# Altium PCB MB1075.PcbDoc (part 1 of 4)
Units mm, origin at the board's own origin, x right, y up, seen from the top; angles counter-clockwise.
Board outline 66 x 119.3 mm, 4 copper layers (TOP, L2, L3, Bottom), stack 1.548 mm thick; 196 components, 219 nets, 897 pads, 500 vias.
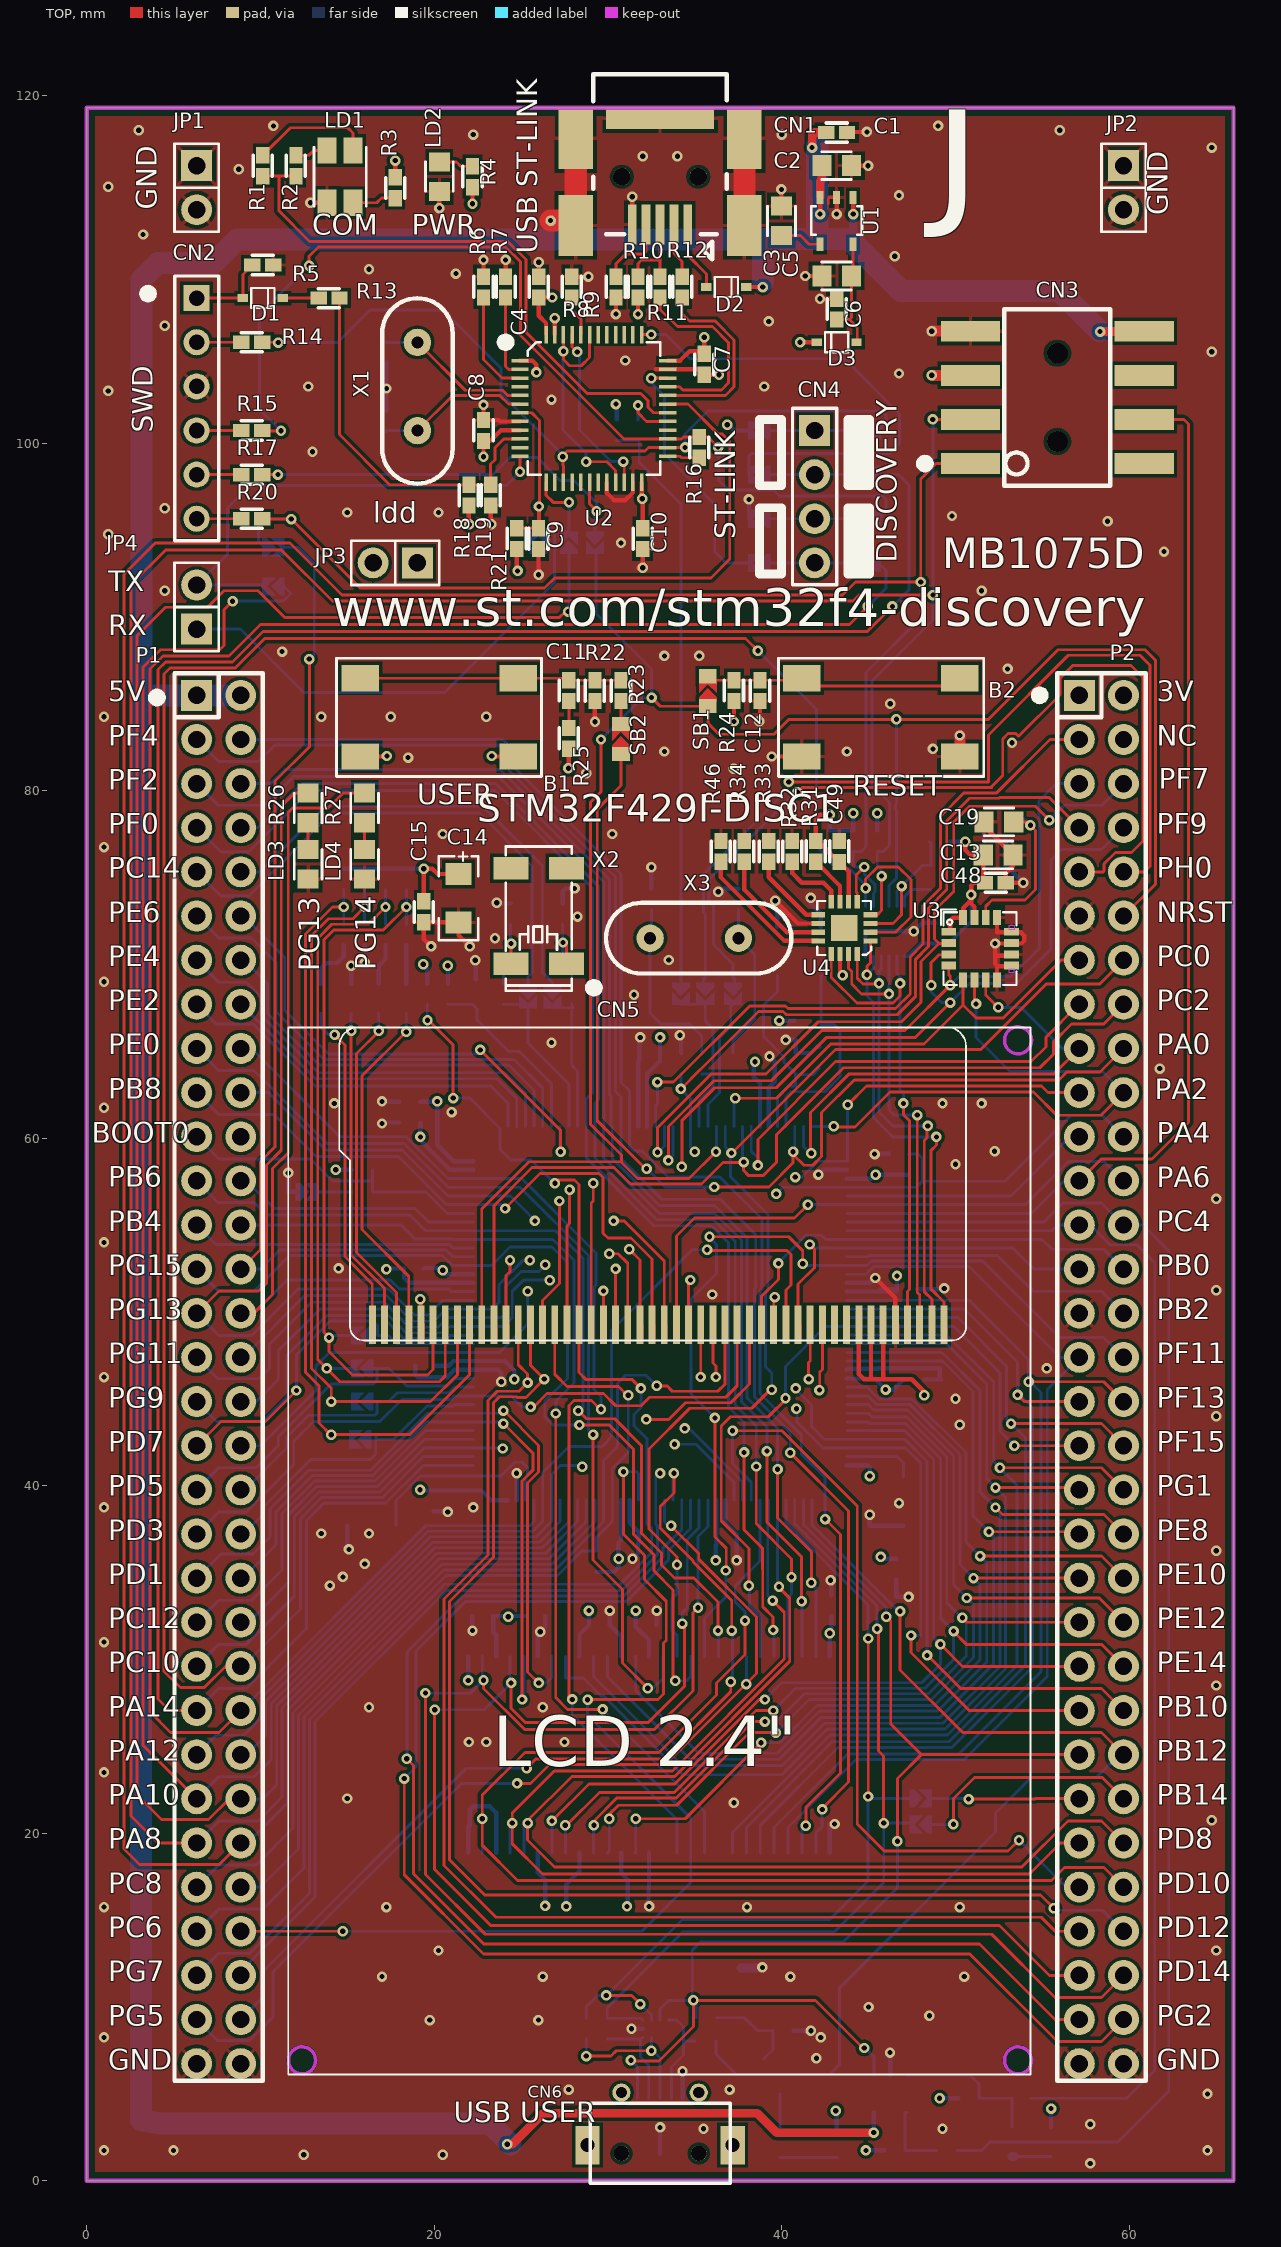
[diagram p0: TOP view]
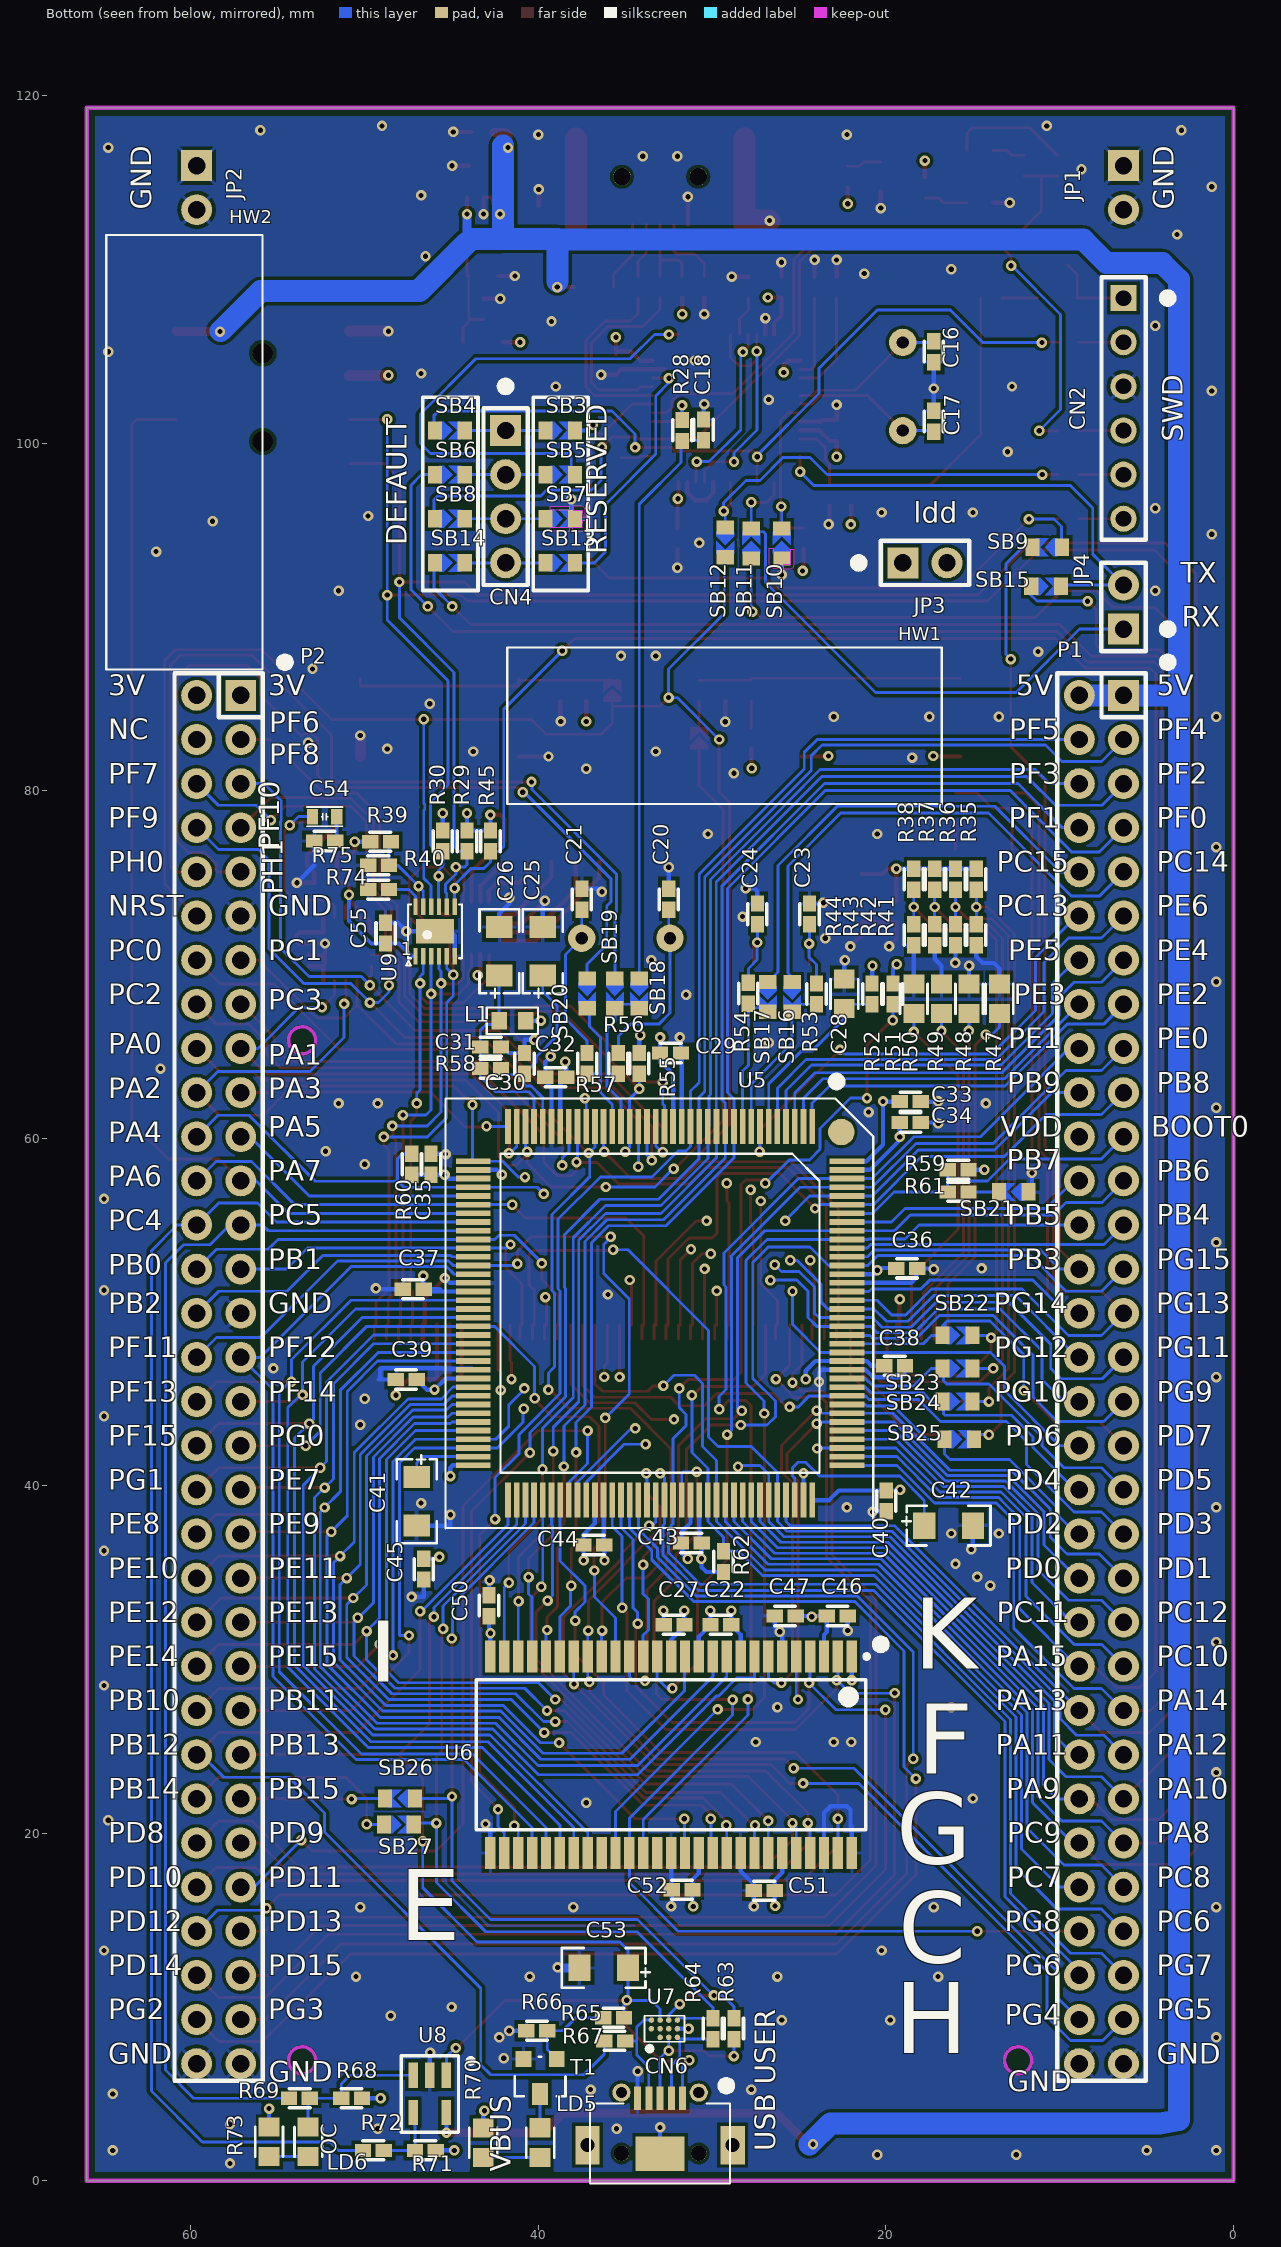
[diagram p1: Bottom view, seen from below]
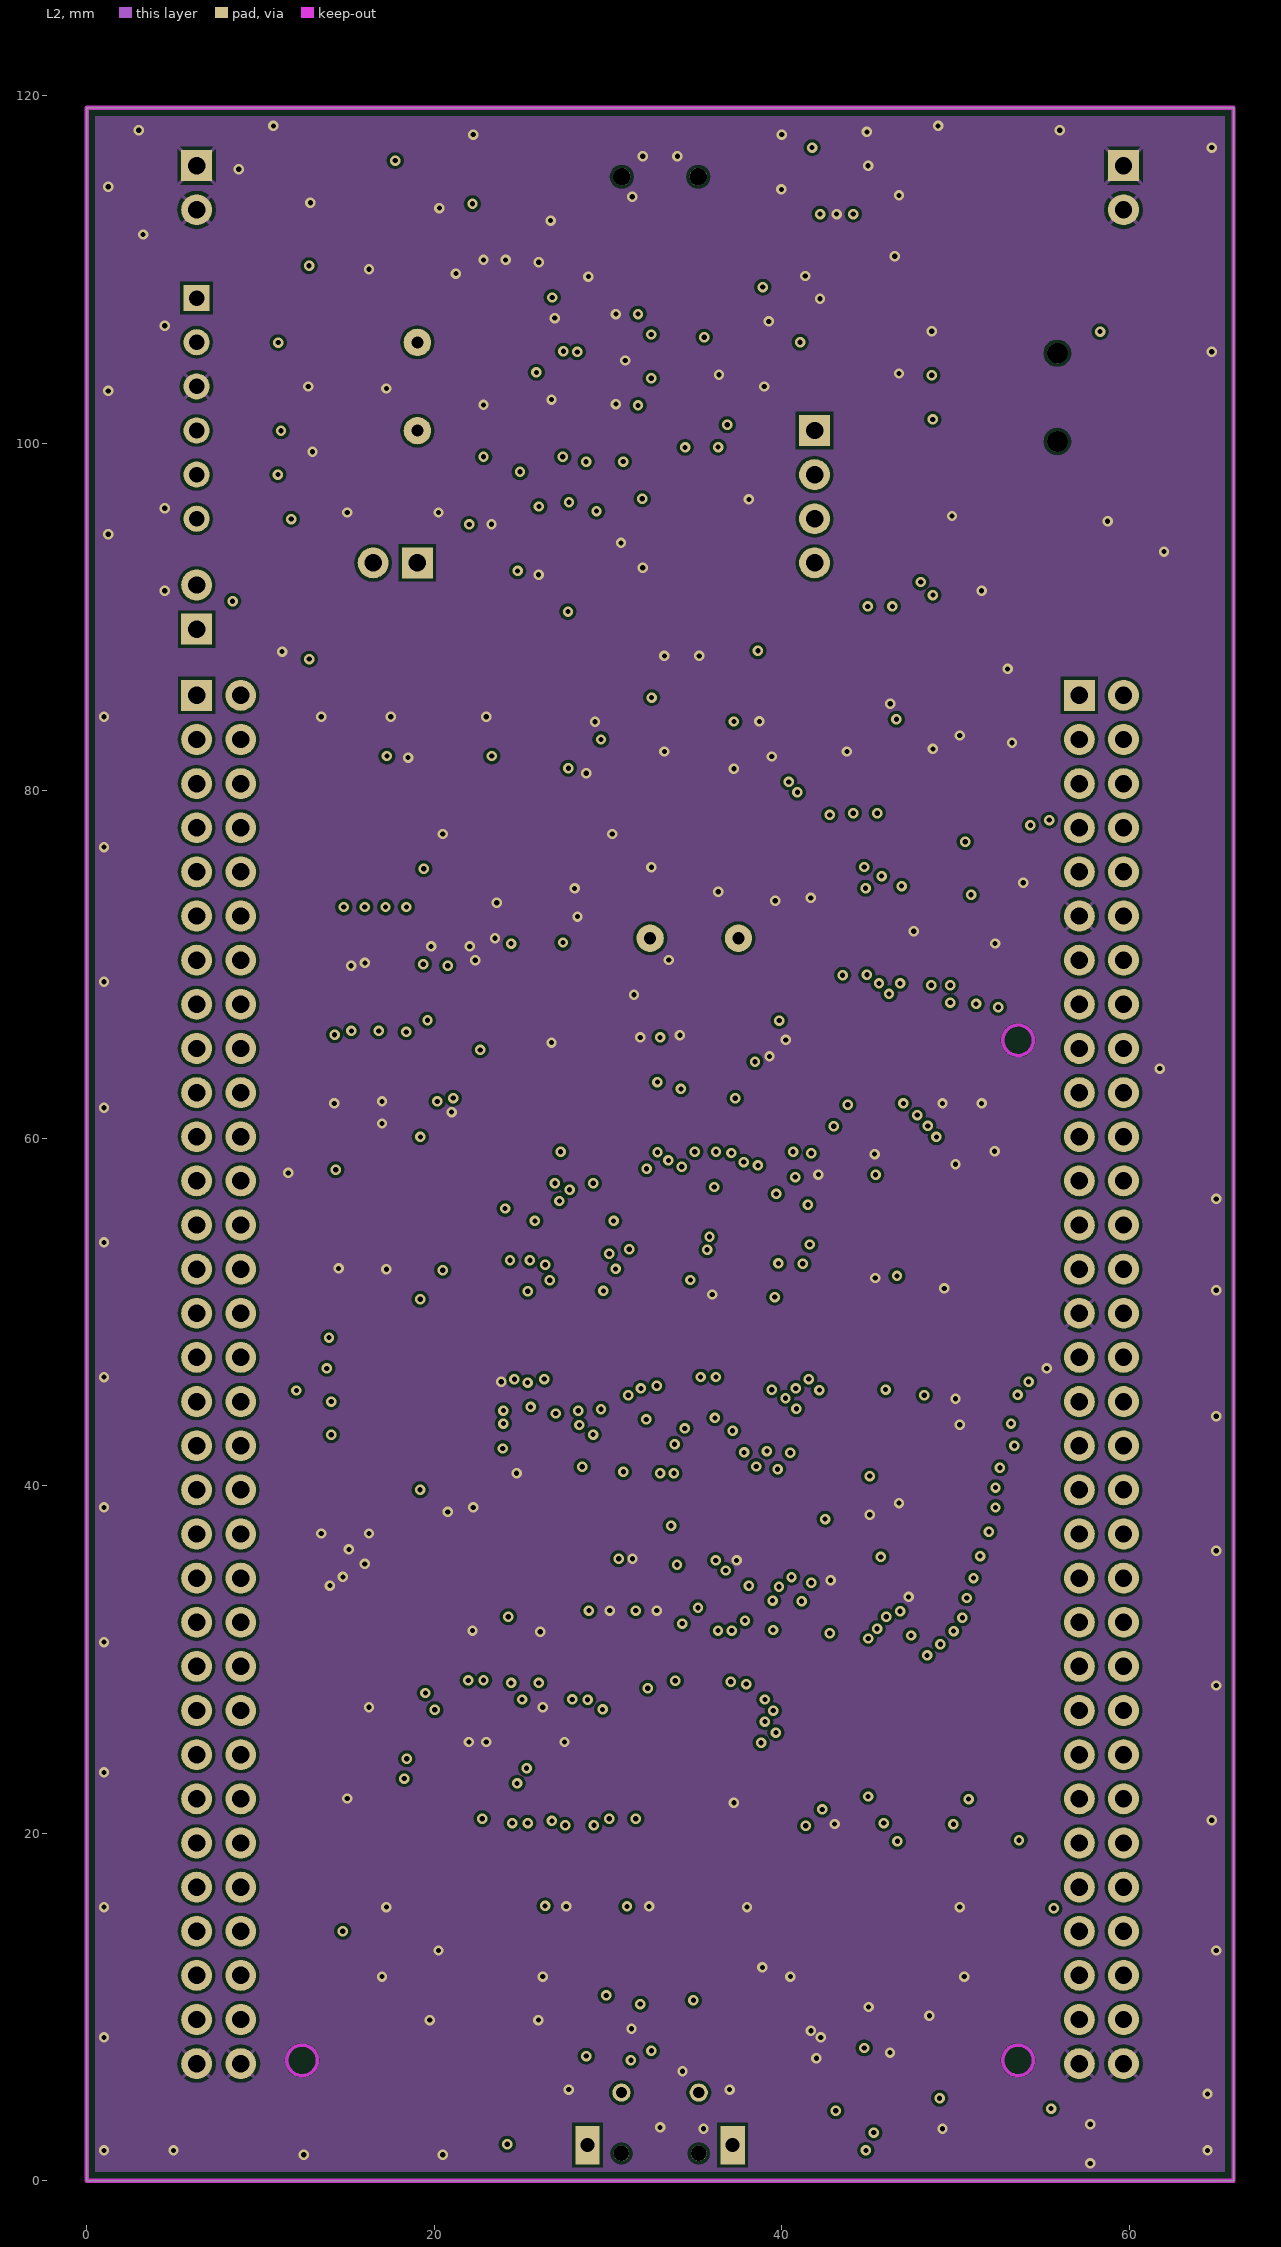
[diagram p2: L2]
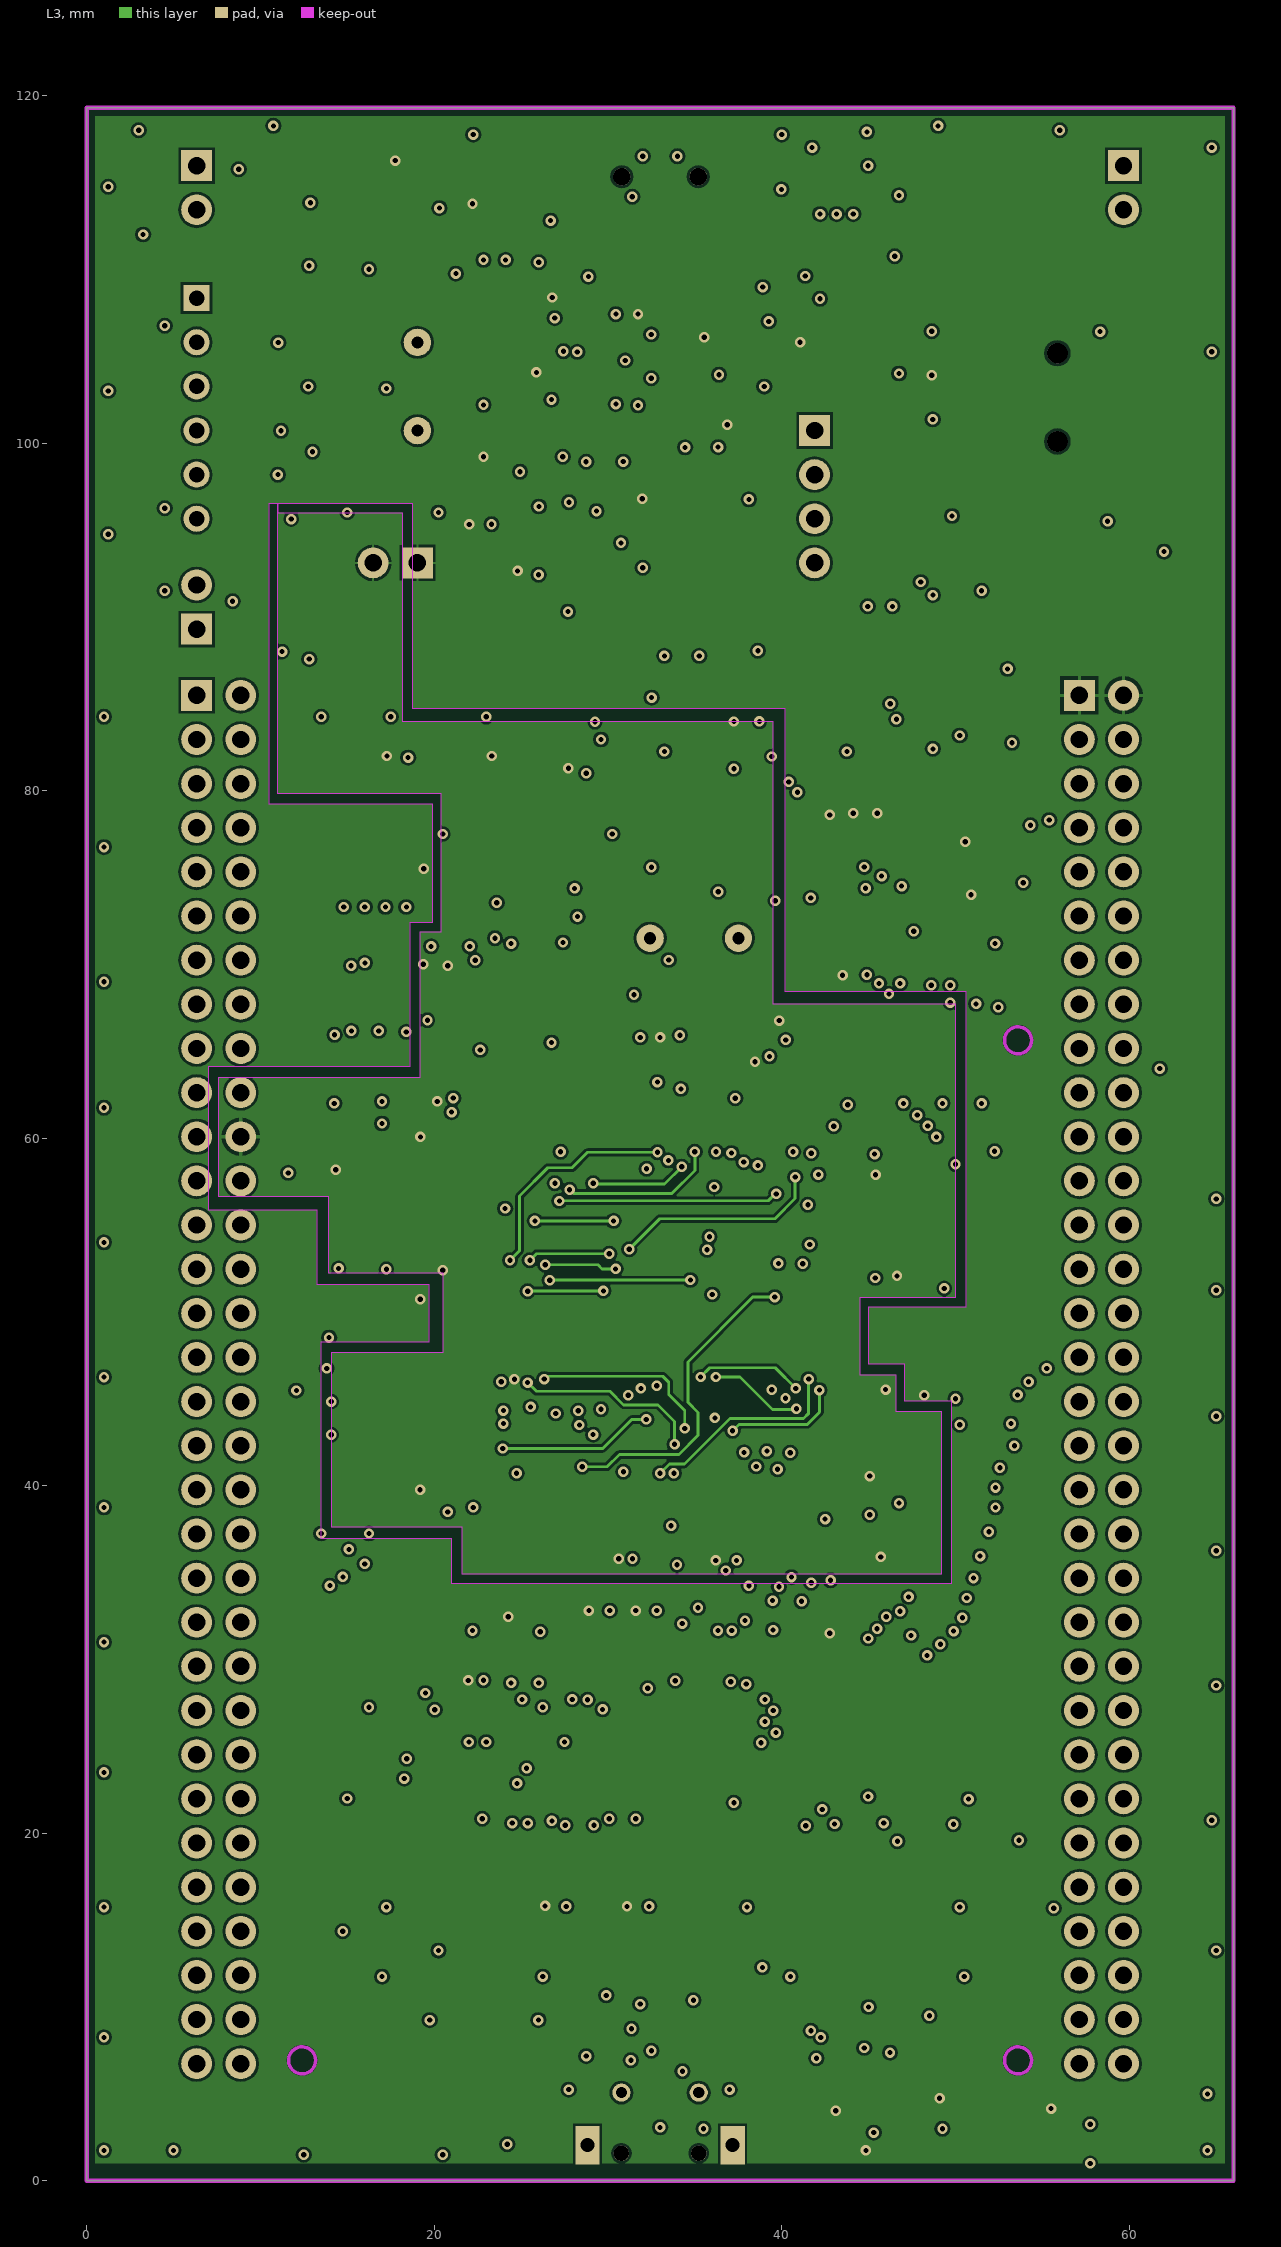
[diagram p3: L3]

## Layer stack, top to bottom
Top Solder: solder mask 0.01, Solder Resist, Dk 3.5
TOP: signal copper 0.012
Dielectric 1: dielectric 0.127, FR-4, Dk 4.8
L2: signal copper 0.035
Dielectric2: dielectric 1.2, FR-4, Dk 4.8
L3: signal copper 0.035
Dielectric3: dielectric 0.127, FR-4, Dk 4.8
Bottom: signal copper 0.012
Bottom Solder: solder mask 0.01, Solder Resist, Dk 3.5

## Board outline
0,0 66,0 66,119.3 0,119.3

## Design rules (kind name [scope] priority, off if disabled: settings)
BoardOutlineClearance [All and not (IsPad and ((Name = 'CN1-6') or (Name = 'CN1-7'))) and not OnSilkscreen and not TouchesRoom('RoomDefinition_C1')] p1: gap=0.5 ignorepadtopadclearanceinfootprint=FALSE
Clearance Clearance_C1 [TouchesRoom('RoomDefinition_C1') vs IsBoardOutline] p1: gap=0.3 ignorepadtopadclearanceinfootprint=FALSE
Clearance Clearance_Keepout [IsKeepout] p2: gap=0 ignorepadtopadclearanceinfootprint=FALSE
Clearance "Clearance_Poly-Poly L3" [InPolygon and OnLayer('L3') vs InPolygon and OnLayer('L3')] p3: gap=0.5 ignorepadtopadclearanceinfootprint=FALSE
Clearance "Clearance_Poly-Hole L3" [InPolygon and OnLayer('L3')] p4: gap=0.15 ignorepadtopadclearanceinfootprint=FALSE
Clearance Clearance_CN1 [IsPad and (Name = 'CN1-6') vs IsKeepout] p5: gap=0 ignorepadtopadclearanceinfootprint=FALSE
Clearance CopperToBoard [InPolygon vs IsBoardOutline] p6: gap=0.5 ignorepadtopadclearanceinfootprint=FALSE
Clearance "Clearance_Pont citroen" [HasFootprint('JP2_SMD') and IsComponentPrimitive and IsRegion vs HasFootprint('JP2_SMD') and IsComponentPrimitive and IsRegion or IsTrack or InPolygon or IsVia] p7: gap=0.1 ignorepadtopadclearanceinfootprint=FALSE except(0.15: Via-Region Poly-Region)
Clearance [All] p8: gap=0.15 ignorepadtopadclearanceinfootprint=FALSE except(0.18: Arc-Fill Arc-Poly Arc-Region Track-Fill Track-Poly Track-Region SMDPad-Fill SMDPad-Poly SMDPad-Region THPad-Fill THPad-Poly THPad-Region Via-Fill Via-Poly Via-Region Fill-Fill Fill-Poly Fill-Region Poly-Poly Poly-Region Region-Region)
ComponentClearance [All and not HasFootprint('VIA')] p1: gap=0.1 collisioncheckmode=3 verticalgap=0.254 showdistances=FALSE
MinimumSolderMaskSliver [All] p1: minsoldermaskwidth=0.1
PolygonConnect "PolygonConnect_P1 P2" [IsPad and ((Name = 'P2-1') or (Name =  'P2-2') or (Name = 'P1-22'))] p1: connectstyle=Relief reliefconductorwidth=0.21 reliefentries=4 polygonreliefangle="90 Angle" airgapwidth=0.21
PolygonConnect PolygonConnect_T1 [IsPad and (Name = 'T1-2')] p2: thpad.connectstyle=Relief thpad.reliefconductorwidth=0.254 thpad.reliefentries=4 thpad.polygonreliefangle="90 Angle" thpad.airgapwidth=0.254 smdpad.connectstyle=Relief smdpad.reliefconductorwidth=0.203 smdpad.reliefentries=4 smdpad.polygonreliefangle="90 Angle" smdpad.airgapwidth=0.21 via.connectstyle=Relief via.reliefconductorwidth=0.254 via.reliefentries=4 via.polygonreliefangle="90 Angle" via.airgapwidth=0.254
PolygonConnect PolygonConnect_JP3 [IsPad and ((Name = 'JP3-1') or (Name = 'JP3-2'))] p3: connectstyle=Relief reliefconductorwidth=0.15 reliefentries=4 polygonreliefangle="90 Angle" airgapwidth=0.15
PolygonConnect "PolygonConnect_Via comp" [HasFootprint('VIA')] p4: connectstyle=Direct reliefconductorwidth=0.254 reliefentries=4 polygonreliefangle="90 Angle" airgapwidth=0.254
PolygonConnect [All] p5: thpad.connectstyle=Relief thpad.reliefconductorwidth=0.21 thpad.reliefentries=4 thpad.polygonreliefangle="45 Angle" thpad.airgapwidth=0.21 smdpad.connectstyle=Relief smdpad.reliefconductorwidth=0.21 smdpad.reliefentries=4 smdpad.polygonreliefangle="90 Angle" smdpad.airgapwidth=0.21 via.connectstyle=Direct via.reliefconductorwidth=0.254 via.reliefentries=4 via.polygonreliefangle="90 Angle" via.airgapwidth=0.254
RoutingVias [All] p1: holewidth=0.3 width=0.6 viastyle="Through Hole" minholewidth=0.3 minwidth=0.6 maxholewidth=0.3 maxwidth=0.6
SolderMaskExpansion SolderMaskExpansion_via [HasFootprint('via') or IsVia] p1: expansion=-1
SolderMaskExpansion [All] p2: expansion=0.05
Width [All] p1: maxlimit=2 minlimit=0.15 preferedwidth=0.165
28 further rules are at their usual default settings.

## Classes and differential pairs
net class PH[0..2]: PH0 PH1 PH2
net class PG[0..15]: PG2 PG3 PG4 PG5 PG6 PG7 PG8 PG9 PG13 PG14 PG15
net class PF[0..15]: PF6 PF7 PF8 PF9 PF10 PF11
net class PE[0..15]: PE0 PE1 PE2 PE3 PE4 PE5 PE6
net class PD[0..15]: PD2 PD4 PD5 PD7 PD11 PD12 PD13
net class PC[0..15]: PC0 PC1 PC2 PC3 PC4 PC5 PC6 PC8 PC9 PC10 PC11 PC12 PC13 PC14 PC15
net class PB[0..15]: PB0 PB1 PB2 PB3 PB4 PB5 PB6 PB7 PB12 PB13 PB14 PB15
net class PA[0..15]: PA0 PA1 PA2 PA4 PA5 PA7 PA8 PA9 PA10 PA11 PA12 PA13 PA14 PA15
net class IM[0..3]: IM0 IM1 IM2 IM3
net class G[0..7]: G0 G1 G2 G3 G4 G5 G6 G7
net class D[0..15]: D0 D1 D2 D3 D4 D5 D6 D7 D8 D9 D10 D11 D12 D13 D14 D15
net class B[0..7]: B0 B1 B2 B3 B4 B5 B6 B7
net class A[0..11]: A0 A1 A2 A3 A4 A5 A6 A7 A8 A9 A10 A11
component class U_USB_OTG_FS: C53 CN6 LD5 LD6 R63 R64 R65 R66 R67 R68 R69 R70 R71 R72 R73 T1 U7 U8
component class U_STM32Fx: C20 C21 C23 C24 C25 C26 C28 C29 C30 C31 C32 C33 C34 C35 C36 C37 C38 C39 C40 C41 C42 C43 C44 C45 L1 R52 R53 R54 R56 R57 R58 R59 R61 SB16 SB17 SB18 SB19 SB20 SB21 SB22 SB23 SB24 SB25 U5 X2 X3
component class U_ST_LINK: C1 C2 C3 C4 C5 C6 C9 C16 C17 C18 C27 C46 C47 CN1 CN2 CN4 D1 D2 D3 JP1 JP2 JP3 JP4 LD1 LD2 R1 R2 R3 R4 R5 R6 R7 R8 R9 R10 R11 R12 R13 R14 R15 R16 R17 R18 R19 R20 R21 R28 SB3 SB4 SB5 SB6 SB7 SB8 SB9 SB10 SB11 SB12 SB13 SB14 SB15 U1 U2 X1
component class U_SDRAM: C7 C8 C10 C15 C22 C50 C51 U6
component class U_LCD-24: C14 C49 C52 C55 CN5 R29 R30 R31 R32 R33 R34 R35 R36 R37 R38 R39 R40 R41 R42 R43 R44 R45 R46 R47 R48 R49 R50 R51 R55 R60 R62 R74 U4 U9
component class "U_IO Peripherals": B1 B2 C11 C12 C13 C19 C48 C54 CN3 LD3 LD4 R22 R23 R24 R25 R26 R27 R75 SB1 SB2 U3
component class MB1075: P1 P2 SB26 SB27

## Components (designator, comment, footprint, x,y, rotation, side; value= is the part's Value field where it differs from the comment)
B1 "SW-PUSH-CMS_BLUE" BP1CMS 20.3,84.21 r90 top
B2 "SW-PUSH-CMS_BLACK" BP1CMS 45.7,84.21 r270 top
C1 "100nF" 0402C 43.16,117.865 r270 top
C2 "1µF_X5R_0603" 0603C 43.16,115.96 r180 top value=1µF
C3 "10nF_X7R_0603" 0603C 39.985,112.785 r270 top value=10NF
C4 "100nF" 0402C 26.015,108.975 r0 top
C5 "1µF_X5R_0603" 0603C 43.16,109.61 r180 top value=1µF
C6 "100nF" 0402C 43.16,107.705 r0 top
C7 "100nF" 0402C 35.54,104.53 r180 top
C8 "100nF" 0402C 22.84,100.72 r0 top
C9 "100nF" 0402C 26,94.5 r180 top
C10 "100nF" 0402C 32,94.5 r180 top
C11 "100nF" 0402C 27.75,85.75 r0 top
C12 "100nF" 0402C 38.75,85.75 r180 top
C13 "10uF" 0603C 52.45,76.3 r180 top value=100nF
C14 "4.7uF" TAN-A 21.4,73.8 r90 top value=100pF
C15 "100nF" 0402C 19.406,73.025 r180 top
C16 "20pF" 0402C 17.25,105.25 r180 bottom value=100nF
C17 "20pF" 0402C 17.25,101.25 r0 bottom value=100nF
C18 "20pF" 0402C 30.5,100.75 r180 bottom value=100nF
C19 "10nF/25V" 0603C 52.5,78.2 r0 top value=100nF
C20 "20pF" 0402C 32.5,73.75 r0 bottom value=100nF
C21 "20pF" 0402C 37.5,73.75 r0 bottom value=100nF
C22 "100nF" 0402C 29.5,32 r90 bottom
C23 "6.8pF" 0402C 24.4,72.9 r0 bottom value=100nF
C24 "6.8pF" 0402C 27.4,72.9 r0 bottom value=100nF
C25 "1uF" TAN-A 39.75,70.75 r270 bottom value=10uF
C26 "1uF" TAN-A 42.25,70.75 r270 bottom value=10uF
C27 "100nF" 0402C 32.197,32 r90 bottom
C28 "1uF" 0603C 22.4,68.3 r270 bottom value=100nF
C29 "100nF" 0402C 32.4,64.9 r270 bottom
C30 "100nF" 0402C 40.8,64.3 r0 bottom
C31 "100nF" 0402C 42.75,65.25 r270 bottom
C32 "100nF" 0402C 39,63.5 r90 bottom
C33 "100nF" 0402C 18.6,62.1 r270 bottom
C34 "100nF" 0402C 18.6,60.9 r270 bottom
C35 "100nF" 0402C 46.176,58.492 r180 bottom
C36 "100nF" 0402C 18.8,52.5 r270 bottom
C37 "100nF" 0402C 47.2,51.3 r90 bottom
C38 "100nF" 0402C 19.506,46.904 r270 bottom
C39 "100nF" 0402C 47.605,46.11 r90 bottom
C40 "100nF" 0402C 19.983,39.125 r0 bottom
C41 "2.2uF" TAN-A 47,39.1 r90 bottom
C42 "2.2uF" TAN-A 16.4,37.7 r0 bottom
C43 "100nF" 0402C 31.2,36.7 r90 bottom
C44 "100nF" 0402C 36.81,36.585 r90 bottom
C45 "100nF" 0402C 46.6,35.2 r0 bottom
C46 "100nF" 0402C 22.8,32.5 r270 bottom
C47 "100nF" 0402C 25.8,32.5 r90 bottom
C48 "100nF" 0402C 52.3,74.7 r270 top
C49 "100nF" 0402C 43.31,76.493 r0 top
C50 "100nF" 0402C 42.843,33.092 r180 bottom
C51 "100nF" 0402C 27,16.7 r90 bottom
C52 "100nF" 0402C 31.73,16.741 r90 bottom
C53 "4.7uF" TAN-A 36.25,12.25 r180 bottom value=47uF
C54 "Capacitor" C0603 52.304,78.5 r0 bottom value=470nF
C55 "100nF" 0402C 48.797,71.8 r0 bottom
CN1 "USB-MINI-typeB" USB-MINI-B-SMD 33,115.325 r0 top
CN2 "Header 6" HDR1X6 6.33,108.34 r270 top
CN3 "SSM-104-L-DH" SSM-104-L-DH 55.86,102.625 r270 top
CN4 "Header 4" "Header 4" 41.89,100.72 r270 top
CN5 "FRD240C48003-B" LCD_FRIDA_FRD240C48003-B 32.959,36.246 r180 top
CN6 "USB-MICRO-AB" USB-MICRO-AB 33,4.75 r90 bottom
D1 "BAT60JFILM" SOD323/A 10.14,108.34 r180 top
D2 "BAT60JFILM" SOD323/A 36.81,108.975 r180 top
D3 "BAT60JFILM" SOD323/A 43.16,105.8 r0 top
HW1 "STICKER_BOARD_REF" STICKER_25X9 29.293,83.73 r0 bottom
HW2 "STICKER_BOARD_REF" STICKER_25X9 60.37,99.478 r90 bottom
JP1 "" SIP2/2.54 6.33,115.96 r270 top
JP2 "" SIP2/2.54 59.67,115.96 r270 top
JP3 "" SIP2/2.54 19.03,93.1 r180 top
JP4 "JP2" SIP2/2.54 6.33,89.29 r90 top
L1 "BEAD" 0603L 41.5,66.75 r0 bottom value=100uH
LD1 "LD_BICOLOR_CMS" HSMF-A201 14.585,115.325 r90 top
LD2 "LED, red" 0603D 20.3,115.325 r270 top
LD3 "Green" 0603D 12.75,75.75 r270 top
LD4 "Red" 0603D 16,75.75 r270 top
LD5 "Green" 0603D 39.9,2.2 r90 bottom
LD6 "Red" 0603D 53.25,2.25 r90 bottom
P1 "Header 32X2" HDR2X32 7.6,46.11 r270 top
P2 "Header 32X2" HDR2X32 58.4,46.11 r270 top
R1 "100" 0402R 10.14,115.96 r180 top value=10K
R2 "100" 0402R 12.045,115.96 r180 top value=10K
R3 "0" 0402R 17.76,114.69 r180 top value=10K
R4 "1K" 0402R 22.205,115.325 r0 top value=10K
R5 "10K" 0402R 10.14,110.245 r90 top
R6 "10K" 0402R 22.84,108.975 r0 top
R7 "10K" 0402R 24.11,108.975 r0 top
R8 "100K" 0402R 27.92,108.975 r0 top value=10K
R9 "100K" 0402R 30.46,108.975 r0 top value=10K
R10 "1K5" 0402R 31.73,108.975 r0 top value=10K
R11 "0" 0402R 33,108.975 r0 top value=10K
R12 "0" 0402R 34.27,108.975 r0 top value=10K
R13 "[NA]" 0402R 13.95,108.34 r90 top value=10K
R14 "22" 0402R 9.505,105.8 r90 top value=10K
R15 "22" 0402R 9.505,100.72 r90 top value=10K
R16 "100" 0402R 35.25,99.75 r180 top value=10K
R17 "22" 0402R 9.505,98.18 r90 top value=10K
R18 "4K7" 0402R 22,97 r180 top value=10K
R19 "4K7" 0402R 23.25,97 r180 top value=10K
R20 "22" 0402R 9.505,95.64 r90 top value=10K
R21 "100K" 0402R 24.75,94.5 r0 top value=10K
R22 "220K" 0402R 29.25,85.75 r180 top value=10K
R23 "330" 0402R 30.75,85.75 r180 top value=10K
R24 "100K" 0402R 37.25,85.75 r0 top value=10K
R25 "100" 0402R 27.75,83 r0 top value=10K
R26 "510" 0603R 12.75,79 r270 top value=10K
R27 "680" 0603R 16,79 r270 top value=10K
R28 "100" 0402R 31.73,100.72 r180 bottom value=10K
R29 "4K7" 0402R 44.11,77.1 r0 bottom value=10K
R30 "4K7" 0402R 45.5,77.1 r0 bottom value=10K
R31 "4K7" 0402R 41.965,76.5 r0 top value=10K
R32 "100K" 0402R 40.6,76.5 r180 top value=10K
R33 "100K" 0402R 39.25,76.5 r180 top value=10K
R34 "100K" 0402R 37.847,76.5 r180 top value=10K
R35 "[N/A]" 0402R 14.8,74.9 r0 bottom value=10K
R36 "4K7" 0402R 16,74.9 r0 bottom value=10K
R37 "4K7" 0402R 17.2,74.9 r0 bottom value=10K
R38 "[N/A]" 0402R 18.4,74.9 r0 bottom value=10K
R39 "[N/A]" 0402R 49.085,77.06 r90 bottom value=10K
R40 "0" 0402R 49.2,75.7 r90 bottom value=10K
R41 "4K7" 0402R 14.8,71.7 r0 bottom value=10K
R42 "[N/A]" 0402R 16,71.7 r0 bottom value=10K
R43 "[N/A]" 0402R 17.2,71.7 r0 bottom value=10K
R44 "4K7" 0402R 18.4,71.7 r0 bottom value=10K
R45 "4K7" 0402R 42.76,77.1 r0 bottom value=10K
R46 "100K" 0402R 36.5,76.5 r180 top value=10K
R47 "0" 0603R 13.474,68.017 r270 bottom value=10K
R48 "0" 0603R 15.22,68.017 r270 bottom value=10K
R49 "0" 0603R 16.808,68.017 r270 bottom value=10K
R50 "0" 0603R 18.395,68.017 r270 bottom value=10K
R51 "4K7" 0402R 19.6,68.3 r0 bottom value=10K
R52 "0" 0402R 20.8,68.3 r0 bottom value=10K
R53 "0" 0402R 24,68.3 r0 bottom value=10K
R54 "0" 0402R 27.92,68.335 r0 bottom value=10K
R55 "4K7" 0402R 34.2,64.3 r0 bottom value=10K
R56 "0" 0402R 35.4,64.3 r0 bottom value=10K
R57 "220" 0402R 37.2,64.3 r0 bottom value=10K
R58 "0" 0402R 42.75,64 r90 bottom value=10K
R59 "[N/A]" 0402R 15.855,58.175 r270 bottom value=10K
R60 "4K7" 0402R 47.288,58.492 r180 bottom value=10K
R61 "510" 0402R 15.855,56.905 r270 bottom value=10K
R62 "4K7" 0402R 29.349,35.632 r180 bottom value=10K
R63 "22" 0402R 28.75,8.75 r180 bottom value=10K
R64 "22" 0402R 29.96,8.75 r180 bottom value=10K
R65 "47K" 0402R 35.675,9.385 r90 bottom value=10K
R66 "[N/A]" 0402R 40.093,8.633 r270 bottom value=10K
R67 "0" 0402R 35.609,8.05 r90 bottom value=10K
R68 "47K" 0402R 50.75,4.75 r90 bottom value=10K
R69 "0" 0402R 53.75,4.75 r270 bottom value=10K
R70 "330" 0603R 43.175,2.19 r90 bottom value=10K
R71 "10K" 0402R 46.5,1.75 r90 bottom
R72 "0" 0402R 49.5,1.75 r90 bottom value=10K
R73 "620" 0603R 55.5,2.25 r90 bottom value=10K
R74 "0" 0402R 49.2,74.3 r90 bottom value=10K
R75 "10K" 0402R 52.3,77.1 r90 bottom
SB1 "Circuit Breaker" JP2_SMD 35.75,85.75 r90 top
SB2 "Circuit Breaker" JP2_SMD 30.75,83 r90 top
SB3 "Circuit Breaker" JP2_SMD 38.715,100.72 r180 bottom
SB4 "Circuit Breaker" JP2_SMD 45.065,100.72 r180 bottom
SB5 "Circuit Breaker" JP2_SMD 38.715,98.18 r180 bottom
SB6 "Circuit Breaker" JP2_SMD 45.065,98.18 r180 bottom
SB7 "Circuit Breaker" JP2_SMD 38.715,95.64 r180 bottom
SB8 "Circuit Breaker" JP2_SMD 45.065,95.64 r180 bottom
SB9 "Circuit Breaker" JP2_SMD 10.75,94 r0 bottom
SB10 "Circuit Breaker" JP2_SMD 26,94.25 r90 bottom
SB11 "Circuit Breaker" JP2_SMD 27.75,94.25 r90 bottom
SB12 "Circuit Breaker" JP2_SMD 29.25,94.25 r270 bottom
SB13 "Circuit Breaker" JP2_SMD 38.715,93.1 r180 bottom
SB14 "Circuit Breaker" JP2_SMD 45.065,93.1 r180 bottom
SB15 "Circuit Breaker" JP2_SMD 10.75,91.75 r180 bottom
SB16 "Circuit Breaker" JP2_SMD 25.4,68.1 r270 bottom
SB17 "Circuit Breaker" JP2_SMD 26.8,68.1 r270 bottom
SB18 "Circuit Breaker" JP2_SMD 34.2,68.3 r270 bottom
SB19 "Circuit Breaker" JP2_SMD 35.6,68.3 r270 bottom
SB20 "Circuit Breaker" JP2_SMD 37.2,68.3 r270 bottom
SB21 "Circuit Breaker" JP2_SMD 12.68,56.905 r0 bottom
SB22 "Circuit Breaker" JP2_SMD 15.855,48.65 r180 bottom
SB23 "Circuit Breaker" JP2_SMD 15.855,46.745 r180 bottom
SB24 "Circuit Breaker" JP2_SMD 15.855,44.84 r180 bottom
SB25 "Circuit Breaker" JP2_SMD 15.75,42.67 r180 bottom
SB26 "Circuit Breaker" JP2_SMD 48,22 r0 bottom
SB27 "Circuit Breaker" JP2_SMD 48,20.5 r180 bottom
T1 "9013-SOT23" SOT-23 39.9,6 r90 bottom
U1 "LD3985M33R" SOT-23-5L 43.16,112.785 r270 top
U2 "STM32F103CBT6" "QFP48 7x7" 29.19,101.99 r270 top
U3 "I3G4250D" ICC_LGA16_4X4_P065_H1P1 51.415,70.9 r0 top
U4 "STMPE811QTR" QFN16_3X3 43.6,72.1 r180 top
U5 "STM32F429ZIT6" TQFP144 33,49.92 r270 bottom
U6 "IS42S16400J" TSOP54-II 32.365,24.52 r270 bottom
U7 "EMIF02-USB03F2" "Flip Chip" 32.5,8.75 r90 bottom
U8 "STMPS2141STR" SOT23-5L 46.25,5 r0 bottom
U9 "SX8651" ICC_DFN12-EPAD_3X3_P045 45.95,71.9 r180 bottom
X1 "8MHz" XTAL1 19.03,100.72 r90 top
X2 "MC306-G-06Q-32.768" MC306-CRYSTAL 26.015,72.78 r90 top
X3 "8MHz" XTAL1 37.5,71.5 r180 top

## Footprints (in the part's own frame and the unit in brackets; to place one, negate y for a bottom-side part, rotate by r counter-clockwise, add the part's x,y. Pads: shape width x height; smd on the part's side, far side on the other; paste and mask are expansions set on the pad)
0402C [mil]
  rect 30x37 smd: 1(0,23.62) 2(0,-23.62)
  silkscreen extent -22,-23 22,24
0402R [mil]
  rect 30x37 smd: 1(0,23.62) 2(0,-23.62)
  silkscreen extent -22,-23 22,24
0603C [mm]
  rect 1.1x1.2 smd: 1(-0.85,0) 2(0.85,0)
  silkscreen extent -0.85,-0.8 0.86,0.8
0603D [mm]
  rect 1.1x1.2 smd: 1(-0.85,0) 2(0.85,0)
  silkscreen extent -0.86,-0.8 0.84,0.8
0603L [mil]
  rect 35x40 smd: 1(-30,0) 2(30,0)
  silkscreen extent -58,-30 58,30
0603R [mm]
  rect 1.1x1.2 smd: 1(-0.85,0) 2(0.85,0)
  silkscreen extent -0.85,-0.8 0.86,0.8
BP1CMS [mm]
  rect 1.52x2.16 smd: 1(-2.25,-4.55) 2(2.25,-4.55) 3(2.25,4.55) 4(-2.25,4.55)
  silkscreen extent -3.4,-5.88 3.4,5.92
C0603 [mm]
  rect 0.64x0.89 smd mask+0.05: 1(-0.7,0) 2(0.7,0)
  silkscreen extent -1.05,-0.55 1.02,0.55, body extent -0.9,-0.5 0.9,0.5, height 1.4
"Flip Chip" [mm]
  round 0.32 smd: A2(0,1) A3(0.5,1) B1(-0.5,0.5) B2(0,0.5) B3(0.5,0.5) C1(-0.5,0) C2(0,0) C3(0.5,0) D1(-0.5,-0.5) D2(0,-0.5) D3(0.5,-0.5)
  silkscreen extent -1.1,-0.9 0.75,1.4
HDR1X6 [mm] "Connector; Header; 6 Position"
  rect 1.5x1.5 hole 0.9: 1(0,0)
  round 1.5 hole 0.9: 2(2.54,0) 3(5.08,0) 4(7.62,0) 5(10.16,0) 6(12.7,0)
  silkscreen extent -1.27,-1.27 13.97,1.27
HDR2X32 [mil]
  rect 70x70 hole 39.37: 1(-1550,-50)
  round 70 hole 39.37: 2(-1550,50) 3(-1450,-50) 4(-1450,50) 5(-1350,-50) 6(-1350,50) 7(-1250,-50) 8(-1250,50) 9(-1150,-50) 10(-1150,50) 11(-1050,-50) 12(-1050,50) 13(-950,-50) 14(-950,50) 15(-850,-50) 16(-850,50) 17(-750,-50) 18(-750,50) 19(-650,-50) 20(-650,50) 21(-550,-50) 22(-550,50) 23(-450,-50) 24(-450,50) 25(-350,-50) 26(-350,50) 27(-250,-50) 28(-250,50) 29(-150,-50) 30(-150,50) 31(-50,-50) 32(-50,50) 33(50,-50) 34(50,50) 35(150,-50) 36(150,50) 37(250,-50) 38(250,50) 39(350,-50) 40(350,50) 41(450,-50) 42(450,50) 43(550,-50) 44(550,50) 45(650,-50) 46(650,50) 47(750,-50) 48(750,50) 49(850,-50) 50(850,50) 51(950,-50) 52(950,50) 53(1050,-50) 54(1050,50) 55(1150,-50) 56(1150,50) 57(1250,-50) 58(1250,50) 59(1350,-50) 60(1350,50) 61(1450,-50) 62(1450,50) 63(1550,-50) 64(1550,50)
  silkscreen extent -1600,-100 1589,100
"Header 4" [mil]
  rect 70x70 hole 39.37: 1(0,0)
  round 70 hole 39.37: 2(100,0) 3(200,0) 4(300,0)
  silkscreen extent -50,-50 350,50
HSMF-A201 [mm]
  rect 1.5x1.1 smd: 1(-1.5,0.75) 2(1.5,0.75) 3(1.5,-0.75) 4(-1.5,-0.75)
  silkscreen extent -1.7,-1.5 1.7,1.5
ICC_DFN12-EPAD_3X3_P045 [mm] "MCD-01952"
  rect 0.25x0.95 smd mask+0.05: 1(-1.125,-1.425) 2(-0.675,-1.425) 3(-0.225,-1.425) 4(0.225,-1.425) 5(0.675,-1.425) 6(1.125,-1.425) 7(1.125,1.425) 8(0.675,1.425) 9(0.225,1.425) 10(-0.225,1.425) 11(-0.675,1.425) 12(-1.125,1.425)
  rect 2.2x1.4 smd mask+0.05: 13(0,0)
  silkscreen extent -1.68,-1.97 1.55,1.55, body extent -1.55,-1.55 1.55,1.55, height 0.8
ICC_LGA16_4X4_P065_H1P1 [mm] "MCD-01963"
  rect 0.85x0.45 smd mask+0.05: 1(-1.8,0.975) 2(-1.8,0.325) 3(-1.8,-0.325) 4(-1.8,-0.975) 9(1.8,-0.975) 10(1.8,-0.325) 11(1.8,0.325) 12(1.8,0.975)
  rect 0.45x0.85 smd mask+0.05: 5(-0.975,-1.8) 6(-0.325,-1.8) 7(0.325,-1.8) 8(0.975,-1.8) 13(0.975,1.8) 14(0.325,1.8) 15(-0.325,1.8) 16(-0.975,1.8)
  silkscreen extent -2.25,-2.1 2.1,2.25, body extent -2.1,-2.1 2.1,2.1, height 1.1
JP2_SMD [mil]
  rect 32x40 smd: 1(-35,0) 2(32.5,0)
  TOP region: -25,-20 -15,-20 5,0 -15,20 -25,20
  TOP region: 25,0 15,0 -5,-20 25,-20
  TOP region: 25,0 15,0 -5,20 25,20
LCD_FRIDA_FRD240C48003-B [mm] "MCD-02110"
  rect 0.4x2.2 smd mask+0.05: 1(-16.38,-13.01) 2(-15.68,-13.01) 3(-14.98,-13.01) 4(-14.28,-13.01) 5(-13.58,-13.01) 6(-12.88,-13.01) 7(-12.18,-13.01) 8(-11.48,-13.01) 9(-10.78,-13.01) 10(-10.08,-13.01) 11(-9.38,-13.01) 12(-8.68,-13.01) 13(-7.98,-13.01) 14(-7.28,-13.01) 15(-6.58,-13.01) 16(-5.88,-13.01) 17(-5.18,-13.01) 18(-4.48,-13.01) 19(-3.78,-13.01) 20(-3.08,-13.01) 21(-2.38,-13.01) 22(-1.68,-13.01) 23(-0.98,-13.01) 24(-0.28,-13.01) 25(0.42,-13.01) 26(1.12,-13.01) 27(1.82,-13.01) 28(2.52,-13.01) 29(3.22,-13.01) 30(3.92,-13.01) 31(4.62,-13.01) 32(5.32,-13.01) 33(6.02,-13.01) 34(6.72,-13.01) 35(7.42,-13.01) 36(8.12,-13.01) 37(8.82,-13.01) 38(9.52,-13.01) 39(10.22,-13.01) 40(10.925,-13.015) 41(11.62,-13.01) 42(12.32,-13.01) 43(13.02,-13.01) 44(13.72,-13.01) 45(14.42,-13.01) 46(15.12,-13.01) 47(15.82,-13.01) 48(16.52,-13.01)
  silkscreen extent -21.36,-30.13 21.36,30.13, body extent -21.36,-30.47 21.36,30.13, height 3.66
MC306-CRYSTAL [mm]
  rect 1.3x2 smd paste+0.05: 1(-2.75,-1.6) 2(2.75,-1.6) 3(2.75,1.6) 4(-2.75,1.6)
  silkscreen extent -4.3,-1.9 4,1.9
QFN16_3X3 [mm]
  rect 0.8x0.3 smd: 1(-1.5,0.75) 2(-1.5,0.25) 3(-1.5,-0.25) 4(-1.5,-0.75) 9(1.5,-0.75) 10(1.5,-0.25) 11(1.5,0.25) 12(1.5,0.75)
  rect 0.3x0.8 smd: 5(-0.75,-1.5) 6(-0.25,-1.5) 7(0.25,-1.5) 8(0.75,-1.5) 13(0.75,1.5) 14(0.25,1.5) 15(-0.25,1.5) 16(-0.75,1.5)
  rect 1.5x1.5 smd: 17(0,0)
  silkscreen extent -1.55,-1.55 1.56,1.55
"QFP48 7x7" [mm]
  rect 0.2x1 smd: 1(-2.75,-4.25) 2(-2.25,-4.25) 3(-1.75,-4.25) 4(-1.25,-4.25) 5(-0.75,-4.25) 6(-0.25,-4.25) 7(0.25,-4.25) 8(0.75,-4.25) 9(1.25,-4.25) 10(1.75,-4.25) 11(2.25,-4.25) 12(2.75,-4.25) 25(2.75,4.25) 26(2.25,4.25) 27(1.75,4.25) 28(1.25,4.25) 29(0.75,4.25) 30(0.25,4.25) 31(-0.25,4.25) 32(-0.75,4.25) 33(-1.25,4.25) 34(-1.75,4.25) 35(-2.25,4.25) 36(-2.75,4.25)
  rect 1x0.2 smd: 13(4.25,-2.75) 14(4.25,-2.25) 15(4.25,-1.75) 16(4.25,-1.25) 17(4.25,-0.75) 18(4.25,-0.25) 19(4.25,0.25) 20(4.25,0.75) 21(4.25,1.25) 22(4.25,1.75) 23(4.25,2.25) 24(4.25,2.75) 37(-4.25,2.75) 38(-4.25,2.25) 39(-4.25,1.75) 40(-4.25,1.25) 41(-4.25,0.75) 42(-4.25,0.25) 43(-4.25,-0.25) 44(-4.25,-0.75) 45(-4.25,-1.25) 46(-4.25,-1.75) 47(-4.25,-2.25) 48(-4.25,-2.75)
  silkscreen extent -3.81,-3.81 3.81,3.81
SIP2/2.54 [mil]
  rect 70x70 hole 39.37: 1(0,0)
  round 70 hole 39.37: 2(100,0)
  silkscreen extent -50,-50 150,50
SOD323/A [mm]
  rect 0.6x0.45 smd: 1(1.143,0) 2(-1.143,0)
  silkscreen extent -0.67,-0.57 0.67,0.57
SOT23-5L [mm]
  rect 0.55x1.45 smd: 1(-0.95,-1.075) 2(0,-1.075) 3(0.95,-1.075) 4(0.95,1.075) 5(-0.95,1.075)
  silkscreen extent -1.65,-2.2 1.65,2.2
SOT-23 [mil]
  rect 36x36 smd: 1(40,-37.5) 2(40,37.5)
  rect 50x36 smd: 3(-40,0.5)
  silkscreen extent -45,-58 45,58
SOT-23-5L [mil]
  rect 30x16 smd: 1(-53.15,37.4) 2(-53.15,0) 3(-53.15,-37.4) 4(53.15,-37.4) 5(53.15,37.4)
  silkscreen extent -33,-58 32,57
SSM-104-L-DH [mm]
  rect 1.2x3.4 smd: 1(3.81,-5) 2(3.81,5) 3(1.27,-5) 4(1.27,5) 5(-1.27,-5) 6(-1.27,5) 7(-3.81,-5) 8(-3.81,5)
  round 1.168 hole 1.2 unplated: 9(2.54,0) 10(-2.54,0)
  silkscreen extent -5.08,-3.05 5.08,3.05
STICKER_25X9 [mm] "Sticker 25mm x 9mm"
  silkscreen extent -12.5,-4.5 12.5,4.5
TAN-A [mil]
  rect 50x60 smd: 1(55,0) 2(-55,0)
  silkscreen extent -95,-45 105,45
TQFP144 [mm]
  rect 2x0.33 smd: 1(-10.75,8.75) 2(-10.75,8.25) 3(-10.75,7.75) 4(-10.75,7.25) 5(-10.75,6.75) 6(-10.75,6.25) 7(-10.75,5.75) 8(-10.75,5.25) 9(-10.75,4.75) 10(-10.75,4.25) 11(-10.75,3.75) 12(-10.75,3.25) 13(-10.75,2.75) 14(-10.75,2.25) 15(-10.75,1.75) 16(-10.75,1.25) 17(-10.75,0.75) 18(-10.75,0.25) 19(-10.75,-0.25) 20(-10.75,-0.75) 21(-10.75,-1.25) 22(-10.75,-1.75) 23(-10.75,-2.25) 24(-10.75,-2.75) 25(-10.75,-3.25) 26(-10.75,-3.75) 27(-10.75,-4.25) 28(-10.75,-4.75) 29(-10.75,-5.25) 30(-10.75,-5.75) 31(-10.75,-6.25) 32(-10.75,-6.75) 33(-10.75,-7.25) 34(-10.75,-7.75) 35(-10.75,-8.25) 36(-10.75,-8.75) 73(10.75,-8.75) 74(10.75,-8.25) 75(10.75,-7.75) 76(10.75,-7.25) 77(10.75,-6.75) 78(10.75,-6.25) 79(10.75,-5.75) 80(10.75,-5.25) 81(10.75,-4.75) 82(10.75,-4.25) 83(10.75,-3.75) 84(10.75,-3.25) 85(10.75,-2.75) 86(10.75,-2.25) 87(10.75,-1.75) 88(10.75,-1.25) 89(10.75,-0.75) 90(10.75,-0.25) 91(10.75,0.25) 92(10.75,0.75) 93(10.75,1.25) 94(10.75,1.75) 95(10.75,2.25) 96(10.75,2.75) 97(10.75,3.25) 98(10.75,3.75) 99(10.75,4.25) 100(10.75,4.75) 101(10.75,5.25) 102(10.75,5.75) 103(10.75,6.25) 104(10.75,6.75) 105(10.75,7.25) 106(10.75,7.75) 107(10.75,8.25) 108(10.75,8.75)
  rect 0.33x2 smd: 37(-8.75,-10.75) 38(-8.25,-10.75) 39(-7.75,-10.75) 40(-7.25,-10.75) 41(-6.75,-10.75) 42(-6.25,-10.75) 43(-5.75,-10.75) 44(-5.25,-10.75) 45(-4.75,-10.75) 46(-4.25,-10.75) 47(-3.75,-10.75) 48(-3.25,-10.75) 49(-2.75,-10.75) 50(-2.25,-10.75) 51(-1.75,-10.75) 52(-1.25,-10.75) 53(-0.75,-10.75) 54(-0.25,-10.75) 55(0.25,-10.75) 56(0.75,-10.75) 57(1.25,-10.75) 58(1.75,-10.75) 59(2.25,-10.75) 60(2.75,-10.75) 61(3.25,-10.75) 62(3.75,-10.75) 63(4.25,-10.75) 64(4.75,-10.75) 65(5.25,-10.75) 66(5.75,-10.75) 67(6.25,-10.75) 68(6.75,-10.75) 69(7.25,-10.75) 70(7.75,-10.75) 71(8.25,-10.75) 72(8.75,-10.75) 109(8.75,10.75) 110(8.25,10.75) 111(7.75,10.75) 112(7.25,10.75) 113(6.75,10.75) 114(6.25,10.75) 115(5.75,10.75) 116(5.25,10.75) 117(4.75,10.75) 118(4.25,10.75) 119(3.75,10.75) 120(3.25,10.75) 121(2.75,10.75) 122(2.25,10.75) 123(1.75,10.75) 124(1.25,10.75) 125(0.75,10.75) 126(0.25,10.75) 127(-0.25,10.75) 128(-0.75,10.75) 129(-1.25,10.75) 130(-1.75,10.75) 131(-2.25,10.75) 132(-2.75,10.75) 133(-3.25,10.75) 134(-3.75,10.75) 135(-4.25,10.75) 136(-4.75,10.75) 137(-5.25,10.75) 138(-5.75,10.75) 139(-6.25,10.75) 140(-6.75,10.75) 141(-7.25,10.75) 142(-7.75,10.75) 143(-8.25,10.75) 144(-8.75,10.75)
  round 1.524 smd: 145(-10.432,10.432)
  silkscreen extent -12.36,-12.35 12.38,12.27
TSOP54-II [mm]
  rect 1.85x0.6 smd: 1(-5.65,10.4) 2(-5.65,9.6) 3(-5.65,8.8) 4(-5.65,8) 5(-5.65,7.2) 6(-5.65,6.4) 7(-5.65,5.6) 8(-5.65,4.8) 9(-5.65,4) 10(-5.65,3.2) 11(-5.65,2.4) 12(-5.65,1.6) 13(-5.65,0.8) 14(-5.65,0) 15(-5.65,-0.8) 16(-5.65,-1.6) 17(-5.65,-2.4) 18(-5.65,-3.2) 19(-5.65,-4) 20(-5.65,-4.8) 21(-5.65,-5.6) 22(-5.65,-6.4) 23(-5.65,-7.2) 24(-5.65,-8) 25(-5.65,-8.8) 26(-5.65,-9.6) 27(-5.65,-10.4) 28(5.65,-10.4) 29(5.65,-9.6) 30(5.65,-8.8) 31(5.65,-8) 32(5.65,-7.2) 33(5.65,-6.4) 34(5.65,-5.6) 35(5.65,-4.8) 36(5.65,-4) 37(5.65,-3.2) 38(5.65,-2.4) 39(5.65,-1.6) 40(5.65,-0.8) 41(5.65,0) 42(5.65,0.8) 43(5.65,1.6) 44(5.65,2.4) 45(5.65,3.2) 46(5.65,4) 47(5.65,4.8) 48(5.65,5.6) 49(5.65,6.4) 50(5.65,7.2) 51(5.65,8) 52(5.65,8.8) 53(5.65,9.6) 54(5.65,10.4)
  silkscreen extent -5.78,-11.2 4.33,11.37
USB-MICRO-AB [mm]
  rect 1.35x0.4 smd: 1(0,-1.3) 2(0,-0.65) 3(0,0) 4(0,0.65) 5(0,1.3)
  rect 2x2.8 smd: 6(-3.2,0)
  rect 2.2x1.4 hole 0.8: 7(-2.7,4.175) 8(-2.7,-4.175)
  round 0.9 hole 0.9 unplated mask+0.1: 9(-3.175,2.225) 10(-3.175,-2.225)
  round 1.05 hole 0.65: 11(0.325,2.225) 12(0.325,-2.225)
  silkscreen extent -4.9,-4.03 -0.3,4.03
USB-MINI-B-SMD [mm]
  rect 0.508x2.3 smd: 1(1.597,-2.75) 2(0.797,-2.75) 3(-0.003,-2.75) 4(-0.803,-2.75) 5(-1.603,-2.75)
  rect 2x3.5 smd: 6(-4.853,-2.8) 6(-4.853,2.2) 6(4.847,-2.8) 6(4.847,2.2)
  rect 6.2x1.2 smd: 6(0,3.35)
  round 1 hole 1 unplated: 11(2.194,0) 12(-2.2,0)
  silkscreen extent -3.85,-4.76 3.85,5.9
XTAL1 [mm]
  round 1.575 hole 0.7: 1(-0.009,-0.005) 2(5.071,-0.005)
  silkscreen extent -3.06,-2.04 7.61,2.03

## Part data
B1: "Non-Open Push-Button 0.1A 24V", Manuf_1=wealthmetal, Manuf_2=FARNELL, Manuf_Part_1=TD0341X-G01-BLU, Manuf_Part_2=535-930, Ref St=9180120
B2: "Non-Open Push-Button 0.1A 24V", Manuf_1=wealthmetal, Manuf_2=FARNELL, Manuf_Part_1=TD0341X-G01-BLA, Manuf_Part_2=535-930, Ref St=9180120
C1 C4 C6 C7 C8 C9 C10 C11 C12 C15 C16 C17 C18 C20 C21 C22 C23 C24 C27 C28 C29 C30 C31 C32 C33 C34 C35 C36 C37 C38 C39 C40 C43 C44 C45 C46 C47 C48 C49 C50 C51 C52 C55: library part Capacitor_ST, "Capacitor 0402 / 0603 / 0805", Revision="July-2002: Re-released for DXP Platform."
  C18 C23 C24: Fitted=NO
C2 C5: library part "CAP SMD 0603  X5R 1µF 25V 10%", "0603  X5R 1µF", Rated voltage=25V, Temperature Max=+125°C, Temperature Min=-55°C, Tolerance=10%, Order code Farnell=1288202RL, Technology=X5R
C3: library part "CAP SMD 0603  X7R 10000PF 50V 10%", "0603  X7R 10NF", Rated voltage=50V, Temperature Max=+125°C, Temperature Min=-55°C, Tolerance=10%, Order code Farnell=7569548RL, Order code RS=2040779, Technology=X7R
C13 C19: library part CAP, "Capacitor", Published=8-Jun-2000, Publisher="Altium Limited", Revision="July-2002: Re-released for DXP Platform."
C14 C25 C26 C53: library part "Cap Pol1", "Polarized Capacitor (Radial)", Published=8-Jun-2000, Publisher="Altium Limited", Revision="July-2002: Re-released for DXP Platform."
C41 C42: library part "Cap Low ESR", "Low ESR Ceramic Capacitor (X7R)", Manuf_Part_1=CC1206KKX7R7BB225, Distrib=FARNELL, Manuf_1=www.yageo.com, Order=CC1206KKX7R7BB225, Revision="July-2002: Re-released for DXP Platform."
C54: library part MCD-01006, "Capacitor, MLCC, 470nF, 16V, X7R, 10%, 0603, T=0.8mm", Alternate_Manufacturer=MURATA, Alternate_Manufacturer_Part_Number=GCM155R71C104KA55D, Manufacturer=YAGEO, Manufacturer_Part_Number=CC0603KRX7R7BB474, Package=C0603, BMS_Part_Number=9142003, ComponentLink1Description=Datasheet, ComponentLink1URL=http://tunmcdsvn.tun.st.com/Component_Datasheet_Library/Trunk/Capacitors/Yageo_Multilayer_Capacitor_X7R_series_100pF_to_22uF/, ECCN_EU=N/A, ECCN_US=N/A, Internal_Part_Number=MCD-01006, Part_Type=Capacitor, Provided_By=SUBCO, Status=Released
CN1: library part "USB-MINI-typeB connector", "USB-MINI-typeB connector", Manuf_2=lyconn, Manuf_Part_1=5075BMR-05-SM, Manuf_Part_2=218205M1110T, Order=5075BMR-05-SM
CN2: "Header, 6-Pin", LatestRevisionDate=17-Jul-2002, LatestRevisionNote="Re-released for DXP Platform.", Publisher="Altium Limited"
CN3: "Header, 5-Pin, Dual row", Publisher="Altium Limited", Revision="17-Jul-2002: Re-released for DXP Platform."
CN4: "Header, 4-Pin", Publisher="Altium Limited", Revision="17-Jul-2002: Re-released for DXP Platform."
CN5: library part MCD-02110, "TFT LCD 2.4inch 240RGB x 320 pixels + RTP", Alternate_Manufacturer=N/A, Manufacturer="FRIDA SHENZEN LCD CO.LTD", Alternate_Manufacturer_Part_Number=N/A, BMS_Part_Number=N/A, ComponentLink1Description=Datasheet, ComponentLink1URL=http://tunmcdsvn.tun.st.com/Component_Datasheet_Library/Trunk/Display/FRIDA_LCD_FRD240C48003-B/FRIDA_LCD_FRD240C48003-B.pdf, ECCN_EU=NEC, ECCN_US=EAR99, Internal_Part_Number=MCD-02110, Manufacturer_Part_Number=FRD240C48003-B, Order_Code_Digikey=N/A, Order_Code_Farnell=N/A, Order_Code_RS=N/A, Package=N/A, Part_Type=Display, Provided_By=n/a, Status=Checked
CN6: "USB-MICRO-AB, 47590-0001, SMT, MOLEX", Manuf_1=MOLEX, Manuf_Part_1=47590-0001, Ref St=xxxxxxx
D1 D2 D3: Manuf_1=STM, Distrib=ST, ECCN_US/EU=EAR99/NEC, Manuf_Part_1=BAT60JFILM, Order=BAT60JFILM, Provided=ST, Revision="July-2002: Re-released for DXP Platform."
HW1 HW2: library part MCD-00235, "Sticker to mention board reference + serial number"
JP1 JP2 JP3: library part JP2
L1: library part Inductor, "Inductor", Manuf_Part_1=FCM1608KF-601T03, Order=FCM1608KF-601T03, Published=8-Jun-2000, Publisher="Altium Limited", Revision="July-2002: Re-released for DXP Platform."
LD1: "Bicolor Led", Manuf_1="Avago Technologies", Manuf_2=everluck, Manuf_Part_1=HSMF-A201-A00J1, Manuf_Part_2=LE-RGW35280, Distrib=RADIOSPARES, Ref St=xxxxxx
LD2: library part LED_red, "LED, red, 0603", Manuf_1=everlight, Manuf_Part_1=19-213-R6C-AP1Q2B/3T, Order=19-213-R6C-AP1Q2B/3T
LD3 LD4 LD5 LD6: library part LED2, "Typical RED, GREEN, YELLOW, AMBER GaAs LED", Published=8-Jun-2000, Publisher="Altium Limited", Revision="July-2002: Re-released for DXP Platform."
P1 P2: "Header, 32-Pin, Dual row", LatestRevisionDate=17-Jul-2002, LatestRevisionNote="Re-released for DXP Platform.", Publisher="Altium Limited"
R1 R2 R3 R4 R5 R6 R7 R8 R9 R10 R11 R12 R13 R14 R15 R16 R17 R18 R19 R20 R21 R22 R23 R24 R25 R26 R27 R28 R29 R30 R31 R32 R33 R34 R35 R36 R37 R38 R39 R40 R41 R42 R43 R44 R45 R46 R47 R48 R49 R50 R51 R52 R53 R54 R55 R56 R57 R58 R59 R60 R61 R62 R63 R64 R65 R66 R67 R68 R69 R70 R71 R72 R73 R74 R75: library part Resistor_ST, "Resistor 0402 / 0603 / 0805"
  R6 R13 R35 R38 R39 R42 R43 R53 R54 R59 R66: Fitted=NO
T1: "NPN Bipolar Transistor"
U1: "Ultra low drop-low noise BiCMOS voltage, regulators low ESR capacitors compatible", Manuf_1=STM, Distrib=ST, ECCN_US/EU=EAR99/NEC, Manuf_Part_1=LD3985M33R, Order=LD3985M33R, Provided=ST, Ref St=9176161
U2: "Medium-density performance line ARM-based 32-bit MCU with 128KB Flash", Manuf_1=STM, Distrib=ST, ECCN_US/EU=3A991A2/NEC, Manuf_Part_1=STM32F103CBT6, Order=STM32F103CBT6, Provided=ST, Ref St=xxxxxxxx
U3: library part MCD-01963, "MEMS motion sensor: 3-axis digital output gyroscope LG4-16 4x4mm", Manufacturer=STMICROELECTRONICS, Package=LGA-16, ComponentLink1Description=Datasheet, ComponentLink1URL=http://tunmcdsvn.tun.st.com/Component_Datasheet_Library/Trunk/IC/STM_I3G4250D_MEMS_3_axis_gyroscope, ECCN_EU=NEC, ECCN_US=EAR99, Internal_Part_Number=MCD-01963, Manufacturer_Part_Number=I3G4250D, Part_Type=IC, Provided_By="SUBCO with ST control", Status=Checked
U4: library part STMPE811, "S-Touch® advanced resistive touchscreen controller, with 8-bit GPIO expander", Manuf_1=STM, Distrib=ST, ECCN_US/EU=EAR99/NEC, Manuf_Part_1=STMPE811QTR, Order=STMPE811QTR, Provided=ST, Ref St=xxxxxxxx
U5: library part STM32F429ZIT6U, "STM32 Big Manta (STM32F429ZIT6U)", Manuf_1=STM, Distrib=ST, ECCN_US/EU=3A991A2/NEC, Manuf_Part_1=STM32F429ZIT6U, Order=STM32F429ZIT6U, Provided=ST, Ref St=9175122
U6: library part IS45S16400J, "SYNCHRONOUS DYNAMIC RAM, 1 Meg Bits x 16 Bits x 4 Banks (64-MBIT)", Manuf_1=ISSI, Manuf_Part_1=IS42S16400J-7TL, ECCN_US/EU=EAR99/NEC, Order=IS42S16400J-7TL
U7: "2-line IPAD, EMI filter including ESD protection", Manuf_1=STM, Distrib=ST, ECCN_US/EU=EAR99/NEC, Manuf_Part_1=EMIF02-USB03F2, Order=EMIF02-USB03F2, Provided=ST, Ref St=9179037
U8: "Enhanced single channel power switches", Manuf_1=STM, Distrib=ST, ECCN_US/EU=EAR99/NEC, Manuf_Part_1=STMPS2141STR, Order=STMPS2141STR, Provided=ST
U9: library part MCD-01952, "Multitouch 4-wire Resistive Touchscreen Controller with 15kV ESD Protection", Manufacturer=SEMTECH, Manufacturer_Part_Number=SX8651IWLTRT, Package="DFN 3x3", ComponentLink1Description=Datasheet, ComponentLink1URL=http://tunmcdsvn.tun.st.com/Component_Datasheet_Library/Trunk/IC/SEMTECH_TOUCH_CONTROLEUR_SX8651, ECCN_EU=NEC, ECCN_US=EAR99, Internal_Part_Number=MCD-01952, Part_Type=IC, Provided_By=SUBCO, Status=Checked
X1 X3: library part XTAL, "Crystal Oscillator,8Mhz,20PF,20PPM,-10-70 degree,DIP,HC-49S", Manuf_Part_1=9SL8000020AFXHF0, Order=9SL8000020AFXHF0
X2: library part XTAL_32K, "Crystal oscillator for clock,32.768K,6PF,20PPM,-40~85 degree,SMT", Manuf_1=JFVNY, Manuf_Part_1=ETMB32.768W060BMPF, Fitted=NO
JP4: Fitted=NO
SB1 SB2 SB3 SB5 SB7 SB11 SB12 SB13 SB15 SB16 SB17 SB18 SB20 SB21: Published=24-Mar-1999, Publisher="Altium Limited", Revision="July-2002: Re-released for DXP Platform.", Solder=YES
SB4 SB6 SB8 SB9 SB10 SB14 SB19 SB22 SB23 SB24 SB25 SB26 SB27: Published=24-Mar-1999, Publisher="Altium Limited", Revision="July-2002: Re-released for DXP Platform.", Solder=NO

## Via types
v1: diameter 0.6, hole 0.3, TOP to Bottom, 375 vias
v2: diameter 0.6, hole 0.3, TOP to Bottom, tented both sides, 125 vias

## Nets (pads, with @x,y where several pads share a name; then routed paths per layer and width w, separated by ;. In a path a pad name is that pad's centre, name@x,y a point inside that pad or via, vN(x,y) a via of type N, cw(c..) or ccw(c..) an arc to the next point about the centre after c; other vN are vias at no path point)
3V: C4.2 C7.2 C8.2 C10.2 C13.2 C14.1 C15.2 C22.2 C27.2 C46.2 C47.2 C48.2 C49.2 C50.2 C51.2 C52.2 C55.1 CN3.5 CN5.6 CN5.7 CN5.8 CN5.44 D3.2 JP3.1 P2.1 P2.2 R3.2 R4.2 R10.2 R18.1 R21.2 R29.2 R30.2 R31.1 R35.2 R36.2 R37.2 R38.2 R39.1 R45.2 R68.2 R70.2 R71.2 R73.2 SB3.2 U2.1 U2.9 U2.24 U2.36 U2.48 U3.1 U3.15 U3.16 U4.6 U4.14 U6.1 U6.3 U6.9 U6.14 U6.27 U6.43 U6.49 U9.1 | length 102.1
  TOP w0.25: R3.2@17.76,115.29 v1(17.76,116.249) ; v1(19.197,50.724) 19.239,50.681 CN5.44@19.239,49.256 ; CN5.44@19.35,48.43 CN5.44@19.35,49.256 ; v1(19.4,75.5) 19.89,75.5 20.193,75.197 C14.1@21.4,75.197 ; C15.2@19.406,73.625 v1@19.406,75.494 ; R18.1@22,96.4 22,95.313 v1(22.018,95.313) ; v1(22.205,113.766) R4.2@22.205,114.725 ; v1(22.84,99.208) C8.2@22.84,100.12 23.229,100.12 23.849,100.74 U2.9@24.94,100.74 ; R21.2@24.75,93.9 24.75,92.64 v1(24.798,92.64) ; U2.1@24.94,104.74 25.646,104.74 25.884,104.503 v1(25.884,104.065) ; U2.48@26.44,106.24 26.44,106.901 26.015,107.326 C4.2@26.015,108.375 v1(26.792,108.375) ; v1(31.73,107.416) R10.2@31.73,108.375 ; U2.24@31.94,97.74 v1@31.94,96.736 ; v1(31.972,96.79) 31.972,96.736 v1@31.94,96.736 ; C10.2@32,95.1 32,96.676 v1@31.94,96.736 ; U2.36@33.44,104.74 34.153,104.74 34.7,105.287 C7.2@35.54,105.287 ; C7.2@35.54,105.13 C7.2@35.54,105.287 ; v1(35.54,106.089) C7.2@35.54,105.287 ; v1(41.058,105.8) D3.2@42.017,105.8 ; R31.1@41.965,77.1 41.965,78.367 42.198,78.6 v1(42.765,78.6) ; R31.1@42.103,77.1 42.654,76.549 42.654,76.509 43.27,75.893 C49.2@43.31,75.893 43.85,75.353 U4.6@43.85,73.6 ; U4.14@43.35,70.6 43.35,69.523 v1(43.5,69.373) ; CN5.8@44.439,49.256 44.439,46.417 44.73,46.126 45.168,46.126 ; CN5.7@45.139,49.256 45.139,46.154 45.168,46.126 ; CN5.6@45.839,49.256 45.839,46.143 45.857,46.126 ; v1(48.2,45.208) 48.2,45.406 47.481,46.126 45.857,46.126 ; U3.1@49.615,71.85 49.7,71.935 49.7,72.5 49.875,72.675 50.44,72.675 50.44,73.24 50.8,73.6 50.9,73.7 ; v1(50.567,77.06) 50.567,76.586 50.853,76.3 C13.2@51.6,76.3 51.6,74.8 C48.2@51.7,74.7 51.06,74.7 50.9,74.54 v1(50.9,74) 50.9,73.7 ; U3.15@51.09,72.675 51.09,73.31 50.9,73.5 50.9,73.7 ; 45.168,46.126 45.857,46.126
  TOP w0.635: v1(48.635,103.895) CN3.5@50.86,103.895
  Bottom w0.21: U9.1@47.075,70.475 47.299,70.475 48.024,71.2 C55.1@48.797,71.2 49.615,71.2 50.9,72.485 v1(50.9,74)
  Bottom w0.25: R35.2@14.8,75.5 R38.2@18.4,75.5 ; R37.2@17.2,75.5 R38.2@18.4,75.5 ; v1(19.4,75.5) R38.2@18.4,75.5 ; v1(21.961,28.794) 21.965,28.794 U6.1@21.965,30.17 ; U6.3@23.565,30.17 23.565,31.415 23.4,31.58 C46.2@23.4,32.5 v1@24.269,32.5 ; v1(24.269,32.457) v1@24.269,32.5 ; C47.2@25.2,32.5 v1@24.269,32.5 ; U6.49@25.965,18.87 25.965,17.744 26.4,17.309 C51.2@26.4,16.7 26.4,15.815 v1(26.38,15.815) ; U6.9@28.365,30.17 28.365,31.439 28.907,31.981 28.907,32.915 v1(28.907,32.812) ; U6.43@30.765,18.87 30.765,17.706 31.13,17.341 C52.2@31.13,16.741 31.13,15.789 v1(31.095,15.789) ; v1(31.606,32.812) 31.606,32.915 31.606,31.888 32.365,31.129 U6.14@32.365,30.17 ; v1(36.861,101.05) 36.93,101.05 37.261,100.72 SB3.2@38.115,100.72 ; v1(42.76,31.505) v1@42.765,31.51 ; U6.27@42.765,30.17 v1@42.765,31.51 ; v1(42.765,78.6) 42.76,78.595 R45.2@42.76,77.7 R29.2@44.11,77.7 v1(44.11,78.7) ; C50.2@42.843,32.492 42.843,31.545 42.8,31.545 v1@42.765,31.51 ; v1(43.109,4.03) 43.175,4.03 R70.2@43.175,3.04 ; v1(44.843,1.75) R71.2@45.9,1.75 ; R30.2@45.5,77.7 v1(45.5,78.7) ; v1(49.086,4.75) R68.2@50.15,4.75 ; R39.1@49.685,77.06 v1(50.567,77.06) ; R73.2@55.5,3.1 v1(55.5,4.156)
5V: C1.2 C2.2 CN3.8 D2.2 P1.1 P1.2 U1.1 U1.3 U8.5 | length 237.5
  TOP w0.25: D2.2@37.953,108.975 v1(38.912,108.975) ; v1(42.21,113.176) U1.3@42.21,114.135 ; v1(44.11,113.176) U1.1@44.11,114.135
  TOP w0.5: v1(24.2,2.1) 24.489,2.1 26.276,3.888 38.597,3.888 39.721,2.764 45.28,2.764 v1(45.292,2.776) ; v1(41.75,117) 41.75,117.75 41.865,117.865 C1.2@42.56,117.865 ; U1.3@42.21,114.135 42.21,115.067 42.31,115.167 C2.2@42.31,115.96 ; v1(58.323,106.412) 60.86,106.412 CN3.8@60.86,106.435
  Bottom w0.25: v1(45.292,2.776) 45.292,3.933 U8.5@45.3,3.925
  Bottom w0.5: 44.11,111.55 v1(44.11,113.176) ; v1@58.285,106.45 v1(58.323,106.412)
  Bottom w1.27: P1.2@8.87,85.48 P1.1@6.33,85.48 3.15,85.48 ; v1@24.4,2.1 23.2,3.3 4.26,3.3 3.142,3.49 3.142,85.48 3.15,85.48 ; 38.912,109.31 38.912,111.7 ; 42.044,117.109 42.044,111.806 42.1,111.75 ; 44.11,111.55 46.91,108.75 ; v1@58.285,106.45 55.985,108.75 46.91,108.75 ; 3.15,85.48 3.15,109.4 4.1,110.35 7.3,110.35 8.65,111.7 38.912,111.7 ; 38.912,111.7 38.912,111.75 42.1,111.75 ; 42.1,111.75 43.85,111.75 46.85,108.75 46.91,108.75
A0: P1.7 U5.10 U6.23 | length 78
  TOP w0.165: v1(37.832,41.914) 37.832,37.468 38.9,36.4 38.9,35.208 38.906,35.202 38.906,33.032 39.504,32.434 v1(39.504,31.697)
  Bottom w0.165: P1.7@6.33,77.86 7.727,76.463 9.314,76.463 12.851,80 23.494,80 29.128,74.366 29.128,62.624 28.75,62.246 U5.10@28.75,60.67 28.75,58.869 32.659,54.96 35.961,54.96 36.945,53.976 36.945,44.52 37.832,43.633 v1(37.832,41.914) ; v1(39.504,31.697) 39.565,31.697 U6.23@39.565,30.17
A1: P1.8 U5.11 U6.24 | length 75.2
  TOP w0.165: v1(38.535,41.104) 38.535,37.815 40.565,35.785 v1(40.565,34.741)
  Bottom w0.165: P1.8@8.87,77.86 9.86,77.86 12.4,80.4 23.54,80.4 29.447,74.493 29.447,62.215 29.25,62.019 U5.11@29.25,60.67 29.25,58.849 32.799,55.3 36.067,55.3 37.323,54.043 37.323,44.646 38.535,43.434 v1(38.535,41.104) ; U6.24@40.365,30.17 40.365,33.575 40.565,33.775 v1(40.565,34.741)
A2: P1.5 U5.12 U6.25 | length 78.3
  TOP w0.165: v1(39.148,41.987) 39.148,40.1 39.15,40.098 39.15,37.9 41.141,35.909 v1(41.141,33.345)
  Bottom w0.165: P1.5@6.33,80.4 7.578,79.152 10.252,79.152 11.9,80.8 23.71,80.8 29.765,74.745 29.765,60.67 U5.12@29.75,60.67 29.75,58.869 32.948,55.671 36.141,55.671 37.677,54.135 37.677,44.832 39.148,43.361 v1(39.148,41.987) ; v1(41.141,33.345) 41.165,33.345 U6.25@41.165,30.17
A3: P1.6 U5.13 U6.26 | length 75.7
  TOP w0.165: v1(39.765,40.947) 39.765,38.135 41.707,36.193 41.707,34.418 v1(41.698,34.409)
  Bottom w0.165: P1.6@8.87,80.4 10.6,80.4 11.408,81.208 23.792,81.208 25.704,79.296 25.704,79.282 30.097,74.889 30.097,62.506 30.182,62.421 30.182,60.67 U5.13@30.25,60.67 30.25,58.828 32.954,56.124 36.134,56.124 37.993,54.265 37.993,45.079 39.765,43.306 v1(39.765,40.947) ; v1(41.698,34.409) 41.965,34.142 U6.26@41.965,30.17
A4: P1.3 U5.14 U6.29 | length 93.2
  TOP w0.165: v1(40.493,41.898) 43.846,38.545 43.846,22.95 42.327,21.431 v1(42.327,21.372)
  Bottom w0.165: P1.3@6.33,82.94 7.6,81.67 9.87,81.67 10.825,82.625 23.675,82.625 24.3,82 24.3,81.162 30.428,75.034 30.428,62.692 30.75,62.37 U5.14@30.75,60.67 30.75,58.825 33.095,56.48 36.467,56.48 38.507,54.44 38.507,51.403 38.436,51.332 38.436,45.119 40.493,43.062 v1(40.493,41.898) ; U6.29@41.965,18.87 41.965,20.023 42.327,20.385 v1(42.327,21.372)
A5: P1.4 U5.15 U6.30 | length 90.2
  TOP w0.165: v1(41.387,20.424) 41.387,21.475 43.38,23.467 43.38,37.192 v1(42.497,38.074)
  Bottom w0.165: P1.4@8.87,82.94 23.96,82.94 24.7,82.2 24.7,81.239 30.746,75.193 30.746,63.208 31.25,62.704 U5.15@31.25,60.67 31.25,59.518 31.513,59.255 31.973,59.255 33.458,57.77 36.436,57.77 38.868,55.338 38.868,51.318 38.751,51.202 38.751,45.301 41.125,42.927 41.125,41.839 42.497,40.467 v1(42.497,38.074) ; U6.30@41.165,18.87 41.165,20.202 v1(41.387,20.424)
A6: P2.31 U5.50 U6.31 | length 54.8
  Bottom w0.165: U6.31@40.365,18.87 40.365,20.329 44.283,24.247 50.507,24.247 55.278,29.018 55.278,45.528 P2.31@57.13,47.38 56.012,47.38 50.772,52.621 45.298,52.621 44.847,52.17 U5.50@43.75,52.17
A7: P2.34 U5.53 U6.32 | length 56.7
  TOP w0.165: v1(54.209,45.983) 58.527,45.983 P2.34@59.67,44.84
  Bottom w0.165: U6.32@39.565,18.87 39.565,20.329 43.799,24.563 50.188,24.563 54.914,29.289 54.914,45.367 v1@54.209,46.072 ; U5.53@43.75,50.67 50.792,50.67 54.209,47.253 v1@54.209,46.072 ; v1(54.209,45.983) v1@54.209,46.072
A8: P2.33 U5.54 U6.33 | length 53.8
  TOP w0.165: v1(53.574,45.221) 53.955,44.84 P2.33@57.13,44.84
  Bottom w0.165: U6.33@38.765,18.87 38.765,20.456 43.235,24.926 49.789,24.926 54.429,29.566 54.429,44.493 53.701,45.221 v1(53.574,45.221) 53.574,47.126 50.526,50.174 43.752,50.174 U5.54@43.75,50.17
A9: P2.36 U5.55 U6.34 | length 56.4
  TOP w0.165: v1(53.193,43.57) 58.4,43.57 P2.36@59.67,42.3
  Bottom w0.165: U6.34@37.965,18.87 37.965,20.329 42.903,25.267 49.632,25.267 54.028,29.664 54.028,42.735 v1(53.193,43.57) 52.939,43.824 52.939,46.872 50.141,49.67 U5.55@43.75,49.67
A10: P2.35 U5.56 U6.22 | length 43.2
  TOP w0.165: v1(38.115,34.246) 38.115,36.385 36.523,37.977 36.523,43.431 37.055,43.963 39.225,43.963 40.296,45.034 v1(40.218,45.034) ; v1(53.387,42.3) P2.35@57.13,42.3
  Bottom w0.165: v1(38.115,34.246) 38.155,34.246 38.155,33.089 38.765,32.479 U6.22@38.765,30.17 ; v1(40.218,45.034) 40.218,46.863 42.525,49.17 U5.56@43.75,49.17 49.879,49.17 52.558,46.491 52.558,43.129 v1(53.387,42.3)
A11: P2.38 U5.57 U6.35 | length 55.6
  TOP w0.165: v1(52.558,41.03) 58.4,41.03 P2.38@59.67,39.76
  Bottom w0.165: U6.35@37.165,18.87 37.165,20.04 42.779,25.653 49.534,25.653 53.532,29.651 53.532,40.024 52.558,40.998 v1(52.558,41.03) 52.2,41.388 52.2,45.96 49.49,48.67 U5.57@43.75,48.67
ADR_A0: R39.2 R40.2 U4.3 U9.11 | length 8.6
  TOP w0.165: U4.3@45.1,72.35 46.4,72.35 46.9,72.85 v1(46.9,74.5)
  Bottom w0.165: U9.11@46.625,73.325 46.625,74.225 v1(46.9,74.5) 48.1,75.7 R40.2@48.6,75.7 48.6,76.945 R39.2@48.485,77.06
AIN_1: R13.2 R18.2 R19.2 U2.10 | length 21.6
  TOP w0.165: R13.2@14.55,108.34 14.55,100.485 17.435,97.6 R18.2@22,97.6 R19.2@23.25,97.6 23.25,98.785 23.494,99.029 23.494,99.728 24.007,100.24 U2.10@24.94,100.24
B2: CN5.29 P1.36 U5.122 | length 29.3
  TOP w0.165: CN5.29@29.739,49.256 v1(29.739,51.211) ; CN5.29@29.85,48.43 CN5.29@29.85,49.256
  L3 w0.165: v1(25.38,51.19) 25.401,51.211 v1(29.739,51.211)
  Bottom w0.165: P1.36@8.87,42.3 10.013,42.3 13.188,45.475 13.188,46.872 13.986,47.67 U5.122@22.25,47.67 23.765,47.67 25.38,49.285 v1(25.38,51.19)
B3: CN5.28 P1.31 U5.126 | length 34.4
  TOP w0.165: CN5.28@30.439,49.256 v1(30.439,52.476) ; CN5.28@30.55,48.43 CN5.28@30.55,49.256
  L3 w0.165: v1(26.396,52.714) 29.428,52.714 29.666,52.476 v1(30.439,52.476)
  Bottom w0.165: P1.31@6.33,47.38 7.56,46.15 9.926,46.15 10.521,46.745 10.521,48.142 12.934,50.555 17.125,50.555 18.564,49.116 20.222,49.116 20.776,49.67 U5.126@22.25,49.67 23.86,49.67 24.11,49.92 24.11,51.444 24.999,52.333 26.015,52.333 v1(26.396,52.714)
B4: CN5.27 P1.32 U5.127 | length 31.2
  TOP w0.165: v1(30.079,53.349) 30.587,53.349 31.139,52.797 CN5.27@31.139,49.256 ; CN5.27@31.25,48.43 CN5.27@31.25,49.256
  L3 w0.165: v1(25.507,52.968) 25.888,53.349 v1(30.079,53.349)
  Bottom w0.165: P1.32@8.87,47.38 8.997,47.38 12.553,50.936 17.252,50.936 18.729,49.459 19.979,49.459 20.69,50.17 U5.127@22.25,50.17 23.348,50.17 23.729,50.551 23.729,51.571 25.126,52.968 v1(25.507,52.968)
B5: CN5.26 P2.19 U5.37 | length 38
  TOP w0.165: v1(31.222,53.603) 31.839,52.986 CN5.26@31.839,49.256 ; CN5.26@31.95,48.43 CN5.26@31.95,49.256 ; v1(43.795,61.918) 44.877,63 54.949,63 55.329,62.62 P2.19@57.13,62.62
  L3 w0.165: v1(31.222,53.603) 32.982,55.363 39.618,55.363 40.773,56.517 v1(40.773,57.758)
  Bottom w0.165: v1(40.773,57.758) 41.159,57.758 42.072,58.67 U5.37@43.75,58.67 43.795,58.715 v1(43.795,61.918)
B6: CN5.25 P1.19 U5.139 | length 38.3
  TOP w0.165: v1(24.083,55.949) 26.091,57.957 29.493,57.957 29.723,57.727 29.723,54.531 30.005,54.248 31.33,54.248 32.539,53.039 CN5.25@32.539,49.256 ; CN5.25@32.65,48.43 CN5.25@32.65,49.256
  Bottom w0.165: P1.19@6.33,62.62 7.6,61.35 10.785,61.35 13.198,58.937 17.952,58.937 20.719,56.17 U5.139@22.25,56.17 23.829,56.17 24.05,55.949 v1(24.083,55.949)
B7: CN5.24 P1.20 U5.140 | length 32.9
  TOP w0.165: v1(30.325,55.236) 30.94,55.236 33.239,52.937 CN5.24@33.239,49.256 ; CN5.24@33.35,48.43 CN5.24@33.35,49.256
  L3 w0.165: v1(25.797,55.236) v1(30.325,55.236)
  Bottom w0.165: P1.20@8.87,62.62 10.456,62.62 13.758,59.318 18.141,59.318 20.789,56.67 U5.140@22.25,56.67 24.394,56.67 25.797,55.267 v1(25.797,55.236)
BOOT0: P1.21 R59.2 R61.2 U5.138 | length 18.8
  Bottom w0.165: P1.21@6.33,60.08 7.61,58.8 12.889,58.8 14.149,57.54 16.455,57.54 ; R59.2@16.455,58.175 16.455,57.54 ; U5.138@22.25,55.67 20.773,55.67 19.538,56.905 R61.2@16.455,56.905 16.455,57.54
D0: P2.60 U5.85 U6.2 | length 84.9
  TOP w0.165: v1(19.495,28.069) 19.5,28.069 19.5,17.622 22.939,14.183 52.089,14.183 55.723,10.55 58.4,10.55 P2.60@59.67,11.82 ; v1(22.84,28.806) 22.84,28.33 25.21,25.96 32.668,25.96 34.9,28.191 34.9,32.7 v1(35.18,32.981)
  Bottom w0.165: v1(19.495,28.069) 19.495,28.052 22.075,28.052 22.765,28.742 v1@22.765,28.806 ; U6.2@22.765,30.17 v1@22.765,28.806 ; v1(22.84,28.806) v1@22.765,28.806 ; v1(35.18,32.981) 35.18,37.08 35.75,37.65 U5.85@35.75,39.17
D1: P2.59 U5.86 U6.4 | length 79.5
  TOP w0.165: v1(20.034,27.105) 19.883,27.105 20.03,26.958 20.03,17.921 23.256,14.695 52.527,14.695 55.403,11.82 P2.59@57.13,11.82 ; v1(24.428,28.647) 24.428,27.188 25.244,26.372 32.317,26.372 34.401,28.456 34.401,31.914 34.279,32.036 v1(34.279,32.065)
  Bottom w0.165: v1(20.034,27.105) 22.885,27.105 v1(24.428,28.647) 24.365,28.647 U6.4@24.365,30.17 ; v1(34.279,32.065) 34.3,32.065 34.3,32.714 34.56,32.975 34.56,36.906 35.25,37.596 U5.86@35.25,39.17
D2: P1.42 U5.114 U6.5 | length 39.5
  TOP w0.165: v1(23.983,43.57) 25.698,41.855 25.698,40.912 25.063,40.277 v1(25.063,27.695)
  Bottom w0.165: P1.42@8.87,34.68 8.997,34.68 10.9,36.583 10.9,38.5 12.975,40.575 16.46,40.575 19.554,43.67 U5.114@22.25,43.67 23.983,43.67 v1(23.983,43.57) ; v1(25.063,27.695) 25.165,27.695 U6.5@25.165,30.17
D3: P1.41 U5.115 U6.7 | length 41.7
  TOP w0.165: v1(23.983,44.32) 24.014,44.32 26.013,42.321 26.013,40.782 25.38,40.149 25.38,29.282 v1(26.015,28.647)
  Bottom w0.165: P1.41@6.33,34.68 7.727,36.077 9.577,36.077 10.55,37.05 10.55,38.65 12.791,40.891 16.329,40.891 19.609,44.17 U5.115@22.25,44.17 23.833,44.17 v1(23.983,44.32) ; v1(26.015,28.647) 26.447,28.647 26.765,28.965 U6.7@26.765,30.17
D4: P2.37 U5.58 U6.8 | length 62.1
  TOP w0.165: v1(52.304,39.887) 57.003,39.887 P2.37@57.13,39.76
  Bottom w0.165: U6.8@27.565,30.17 27.565,28.928 28.596,28.928 29.636,27.888 29.776,27.888 34.297,23.367 40,23.367 42.625,25.991 49.414,25.991 52.878,29.455 52.878,39.313 v1(52.304,39.887) 51.8,40.391 51.8,45.852 49.482,48.17 U5.58@43.75,48.17
D5: P2.40 U5.59 U6.10 | length 62
  TOP w0.165: v1(52.304,38.744) 52.706,38.342 58.548,38.342 P2.40@59.67,37.22
  Bottom w0.165: U6.10@29.165,30.17 29.165,29.012 34.282,23.896 40.032,23.896 42.468,26.332 49.29,26.332 52.558,29.6 52.558,38.49 v1(52.304,38.744) 51.4,39.648 51.4,45.49 49.22,47.67 U5.59@43.75,47.67
D6: P2.39 U5.60 U6.11 | length 57.1
  TOP w0.165: v1(51.923,37.347) 57.13,37.347 P2.39@57.13,37.22
  Bottom w0.165: U6.11@29.965,30.17 29.965,29.012 34.723,24.254 39.863,24.254 42.278,26.67 49.12,26.67 52.177,29.727 52.177,37.093 v1(51.923,37.347) 51,38.27 51,45.423 49.253,47.17 U5.60@43.75,47.17
D7: P2.42 U5.63 U6.13 | length 55.6
  TOP w0.165: v1(51.415,35.95) 58.4,35.95 P2.42@59.67,34.68
  Bottom w0.165: U6.13@31.565,30.17 31.603,30.17 31.603,28.2 35.202,24.601 39.74,24.601 42.171,27.032 48.974,27.032 51.796,29.854 51.796,35.569 v1(51.415,35.95) 50.6,36.765 50.6,41.9 47.503,44.997 45.584,44.997 44.91,45.67 U5.63@43.75,45.67
D8: P2.41 U5.64 U6.42 | length 51.9
  TOP w0.165: v1(31.603,20.837) 34.444,20.837 v1(38.814,25.207) ; v1(51.034,34.68) P2.41@57.13,34.68